# Altium PCB UZ_D_Temperature_Card_LTC2983.PcbDoc (part 1 of 2)
Units mm, origin at the board's own origin, x right, y up, seen from the top; angles counter-clockwise.
Board outline 155.99 x 100 mm, 4 copper layers (Top Layer, Layer 1, Layer 2, Bottom Layer), stack 0.98 mm thick; 288 components, 267 nets, 958 pads, 313 vias.
Unrouted connection lines stored in the file: 35.
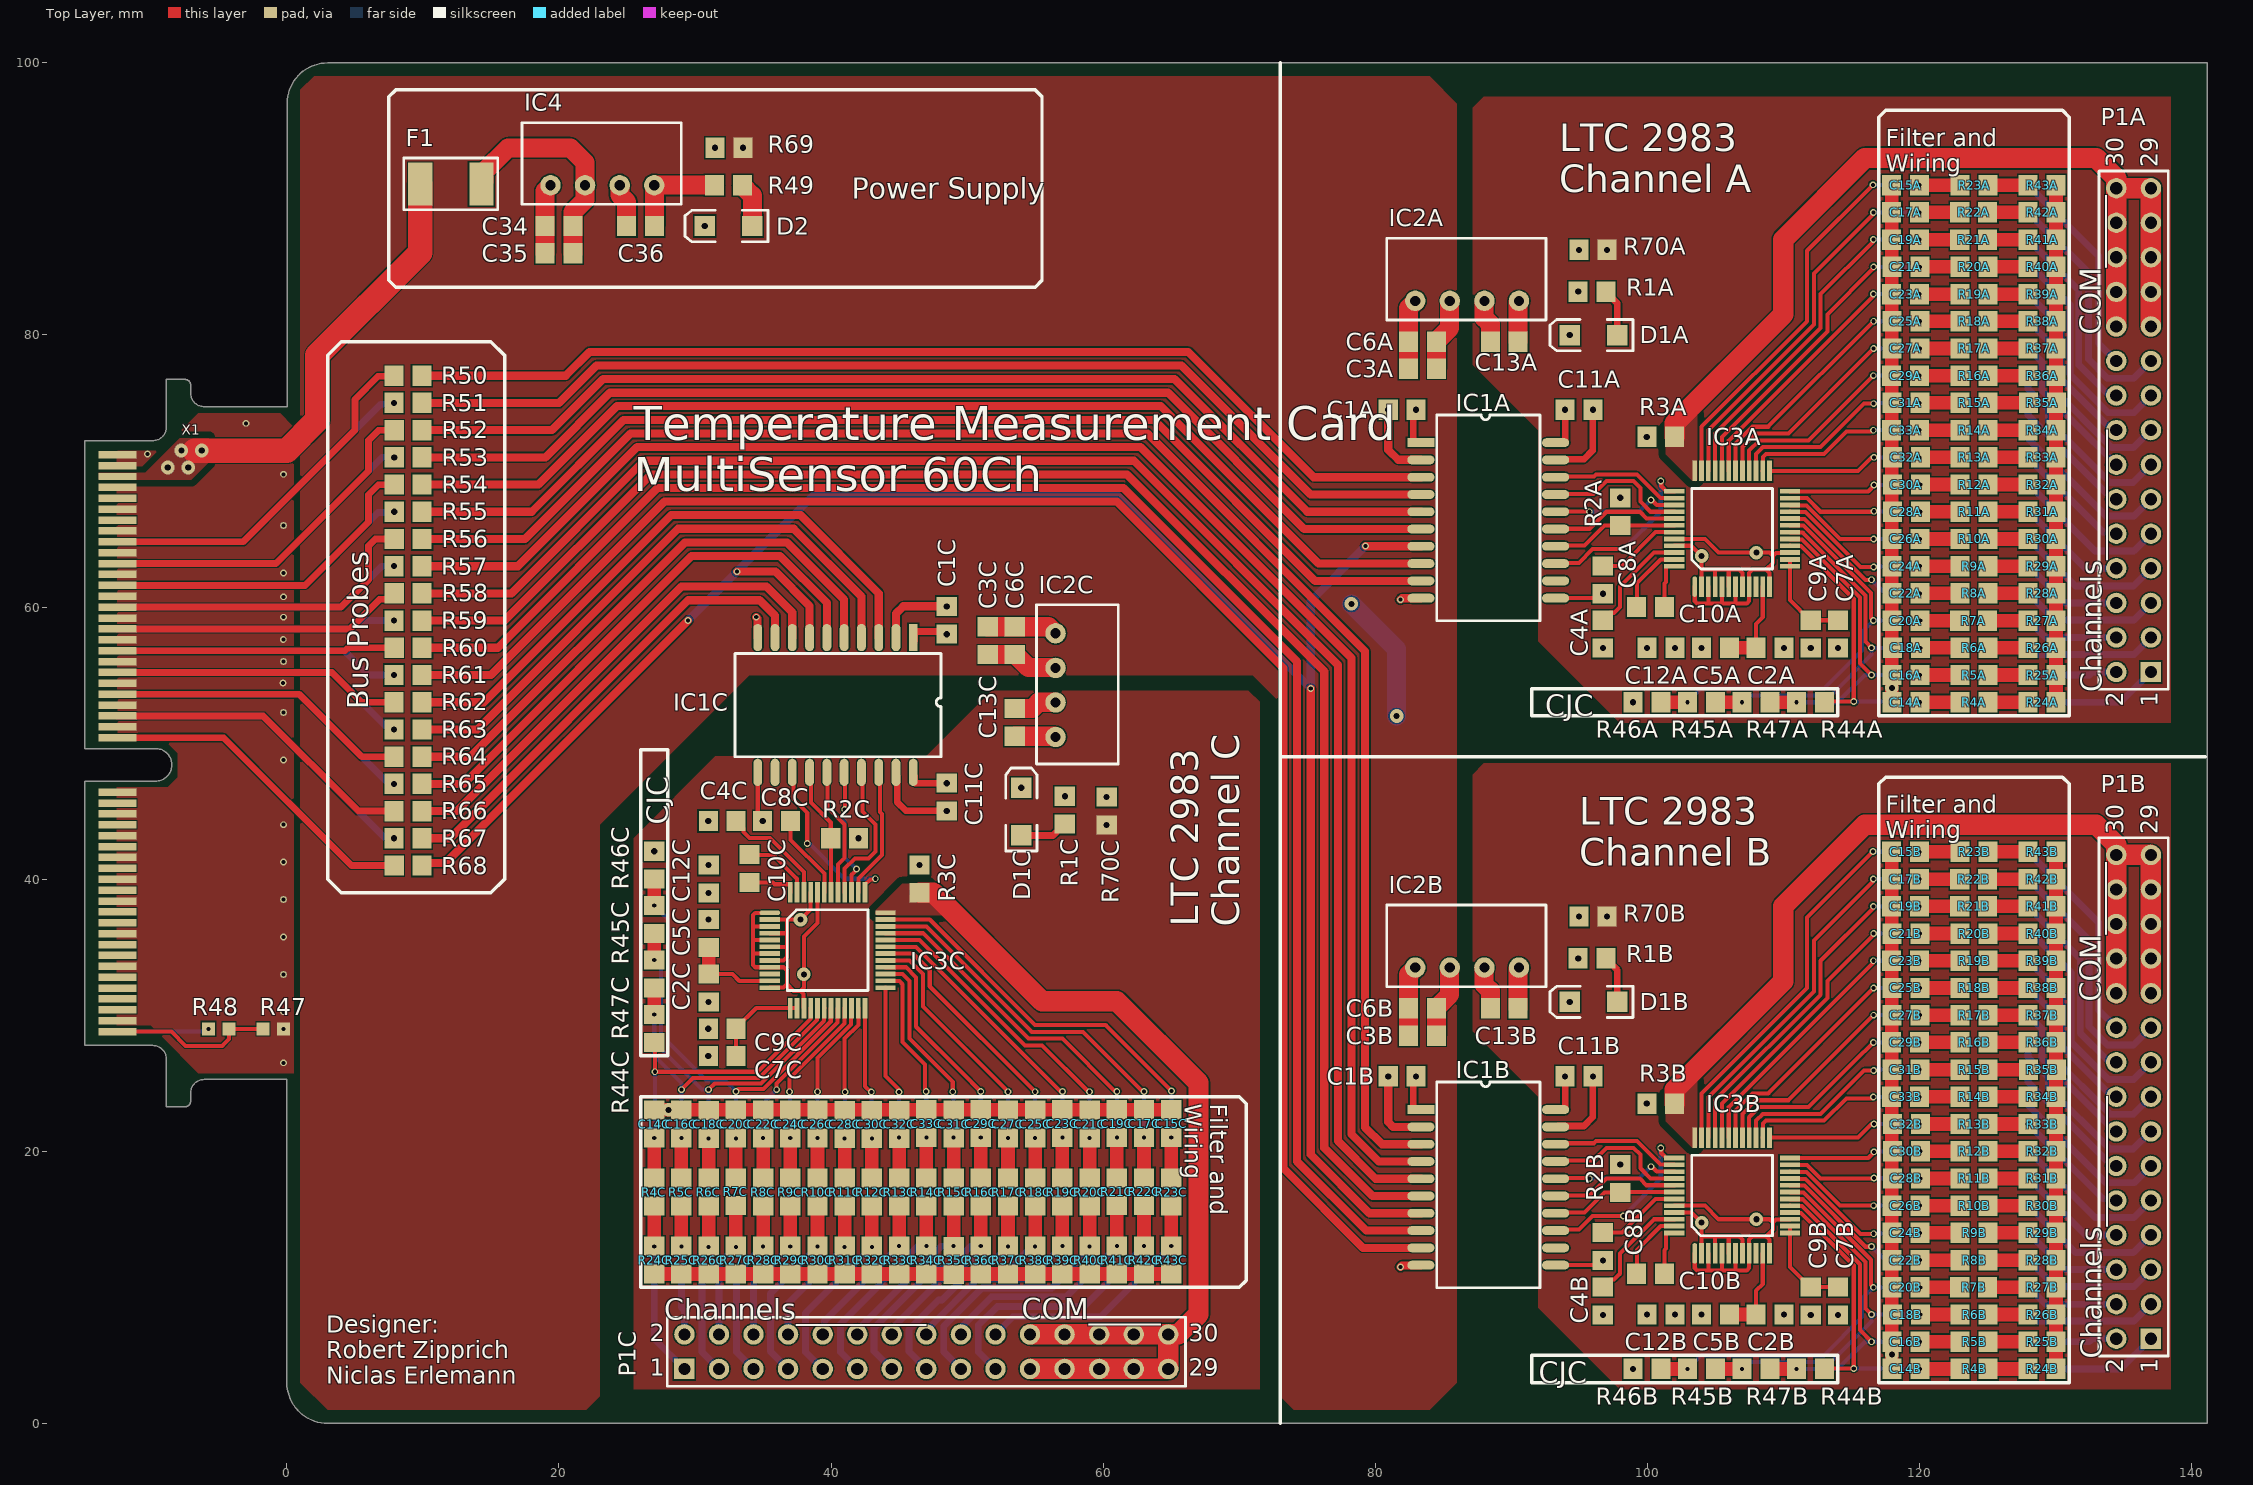
[diagram p0: Top Layer view]
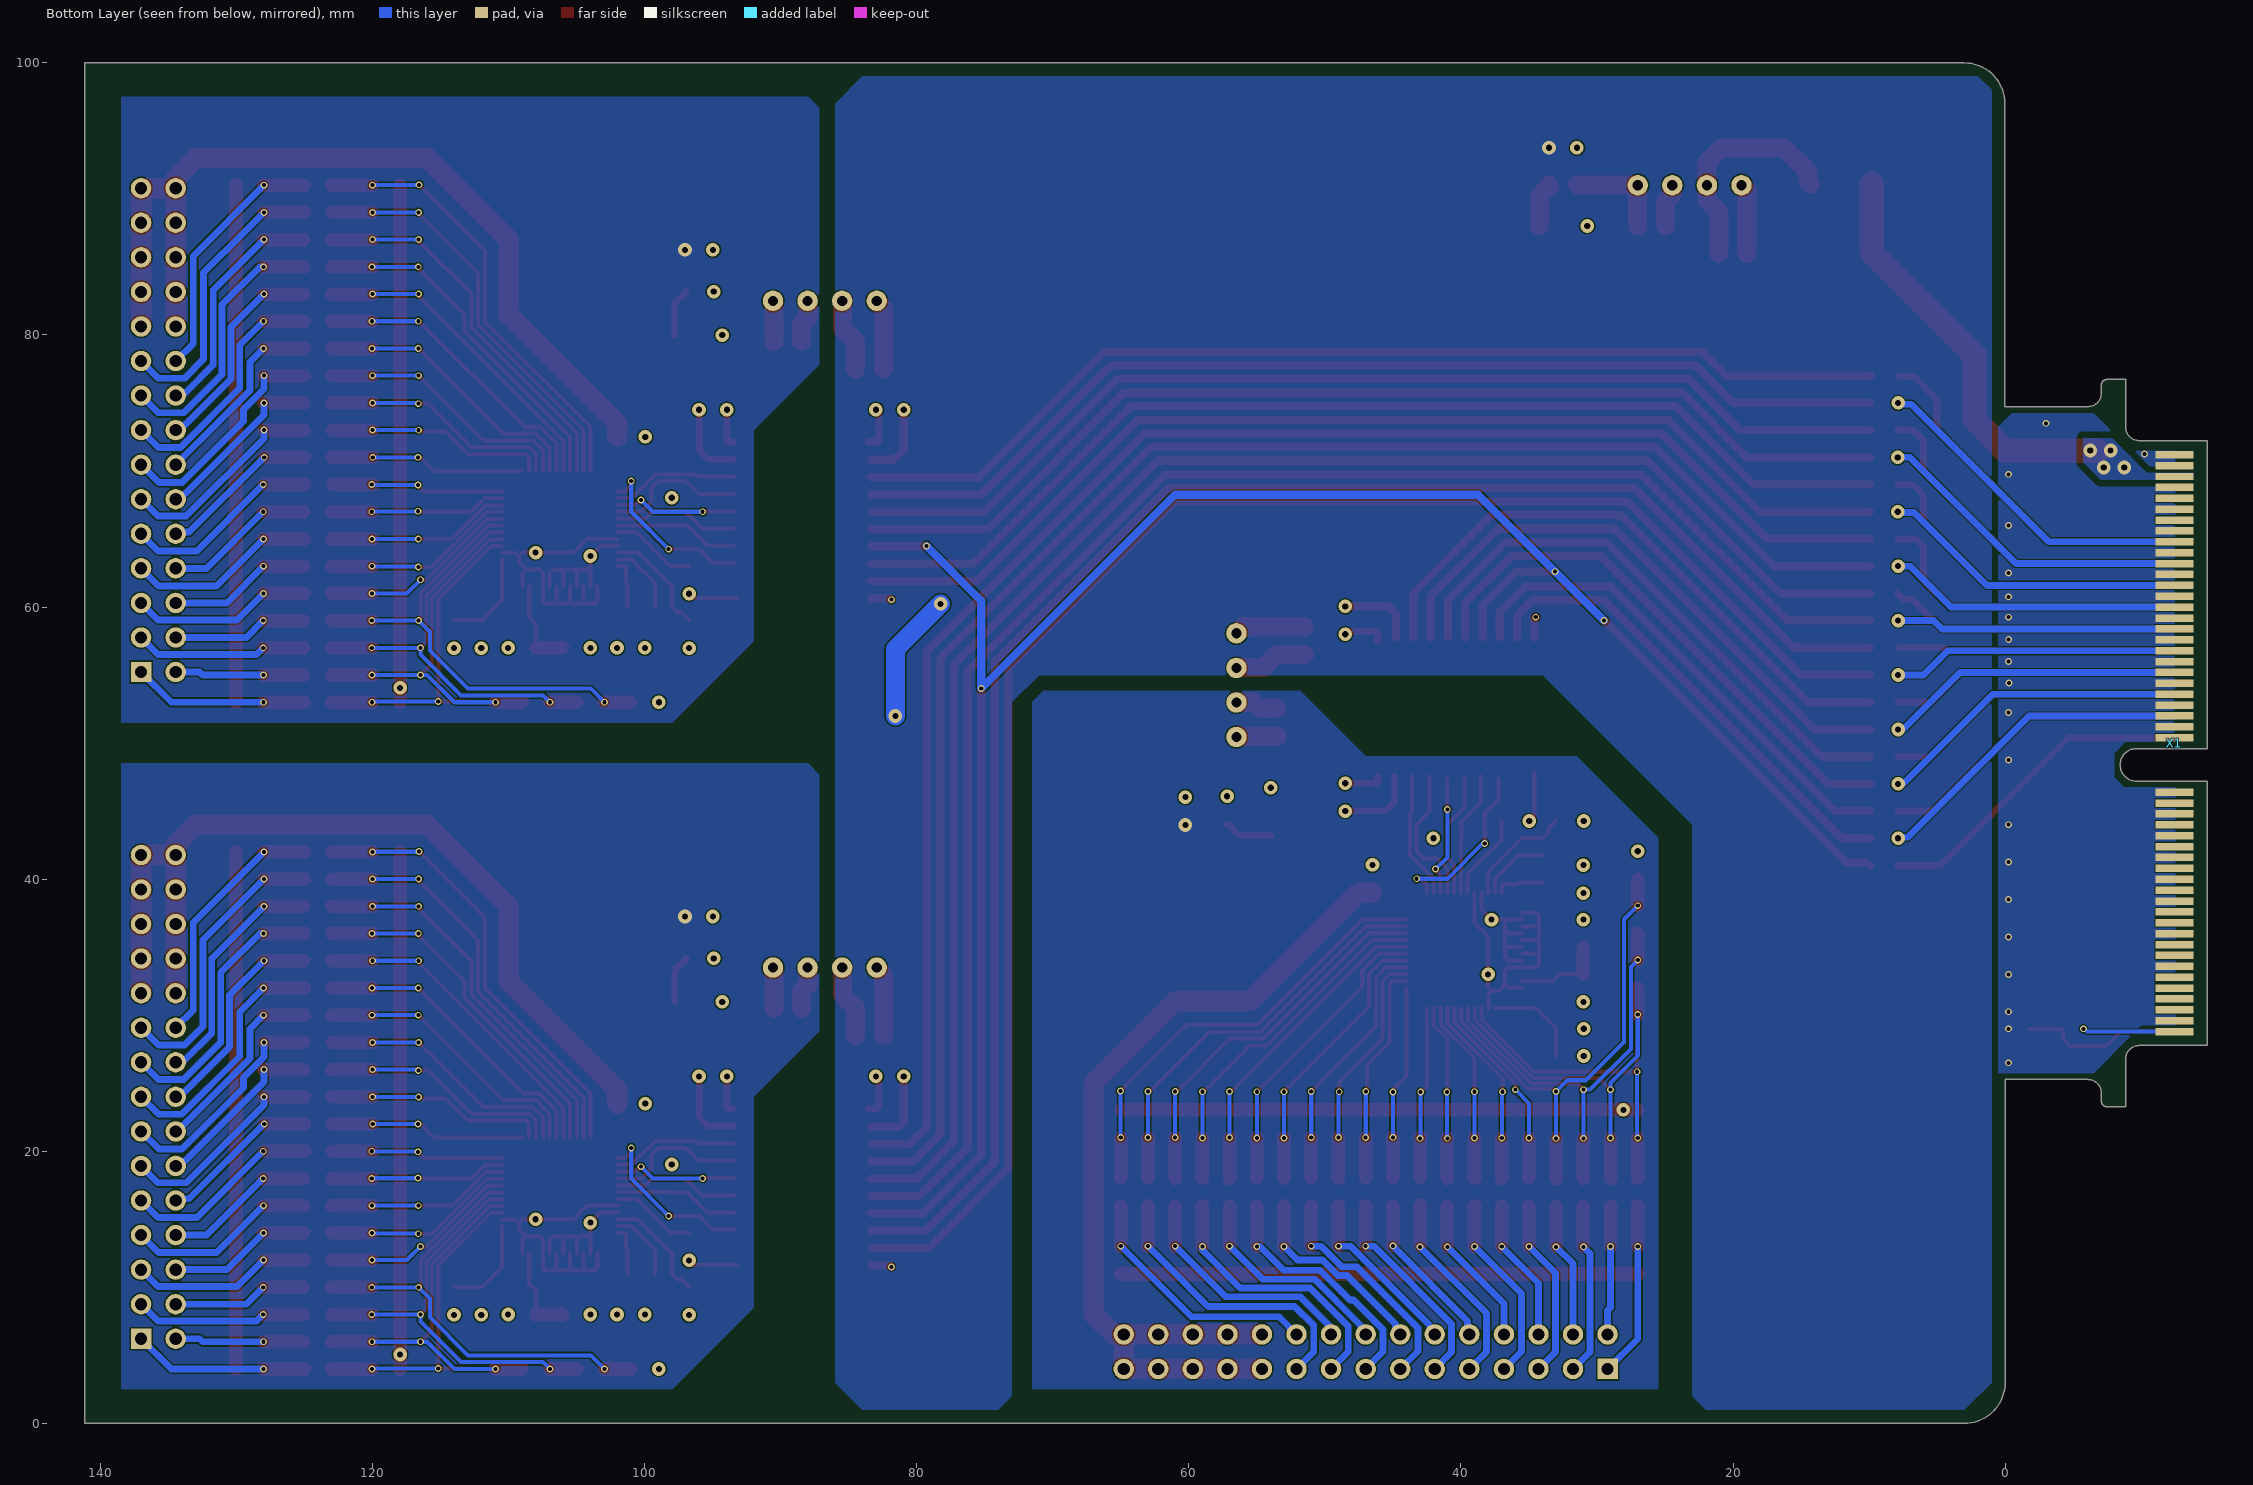
[diagram p1: Bottom Layer view, seen from below]
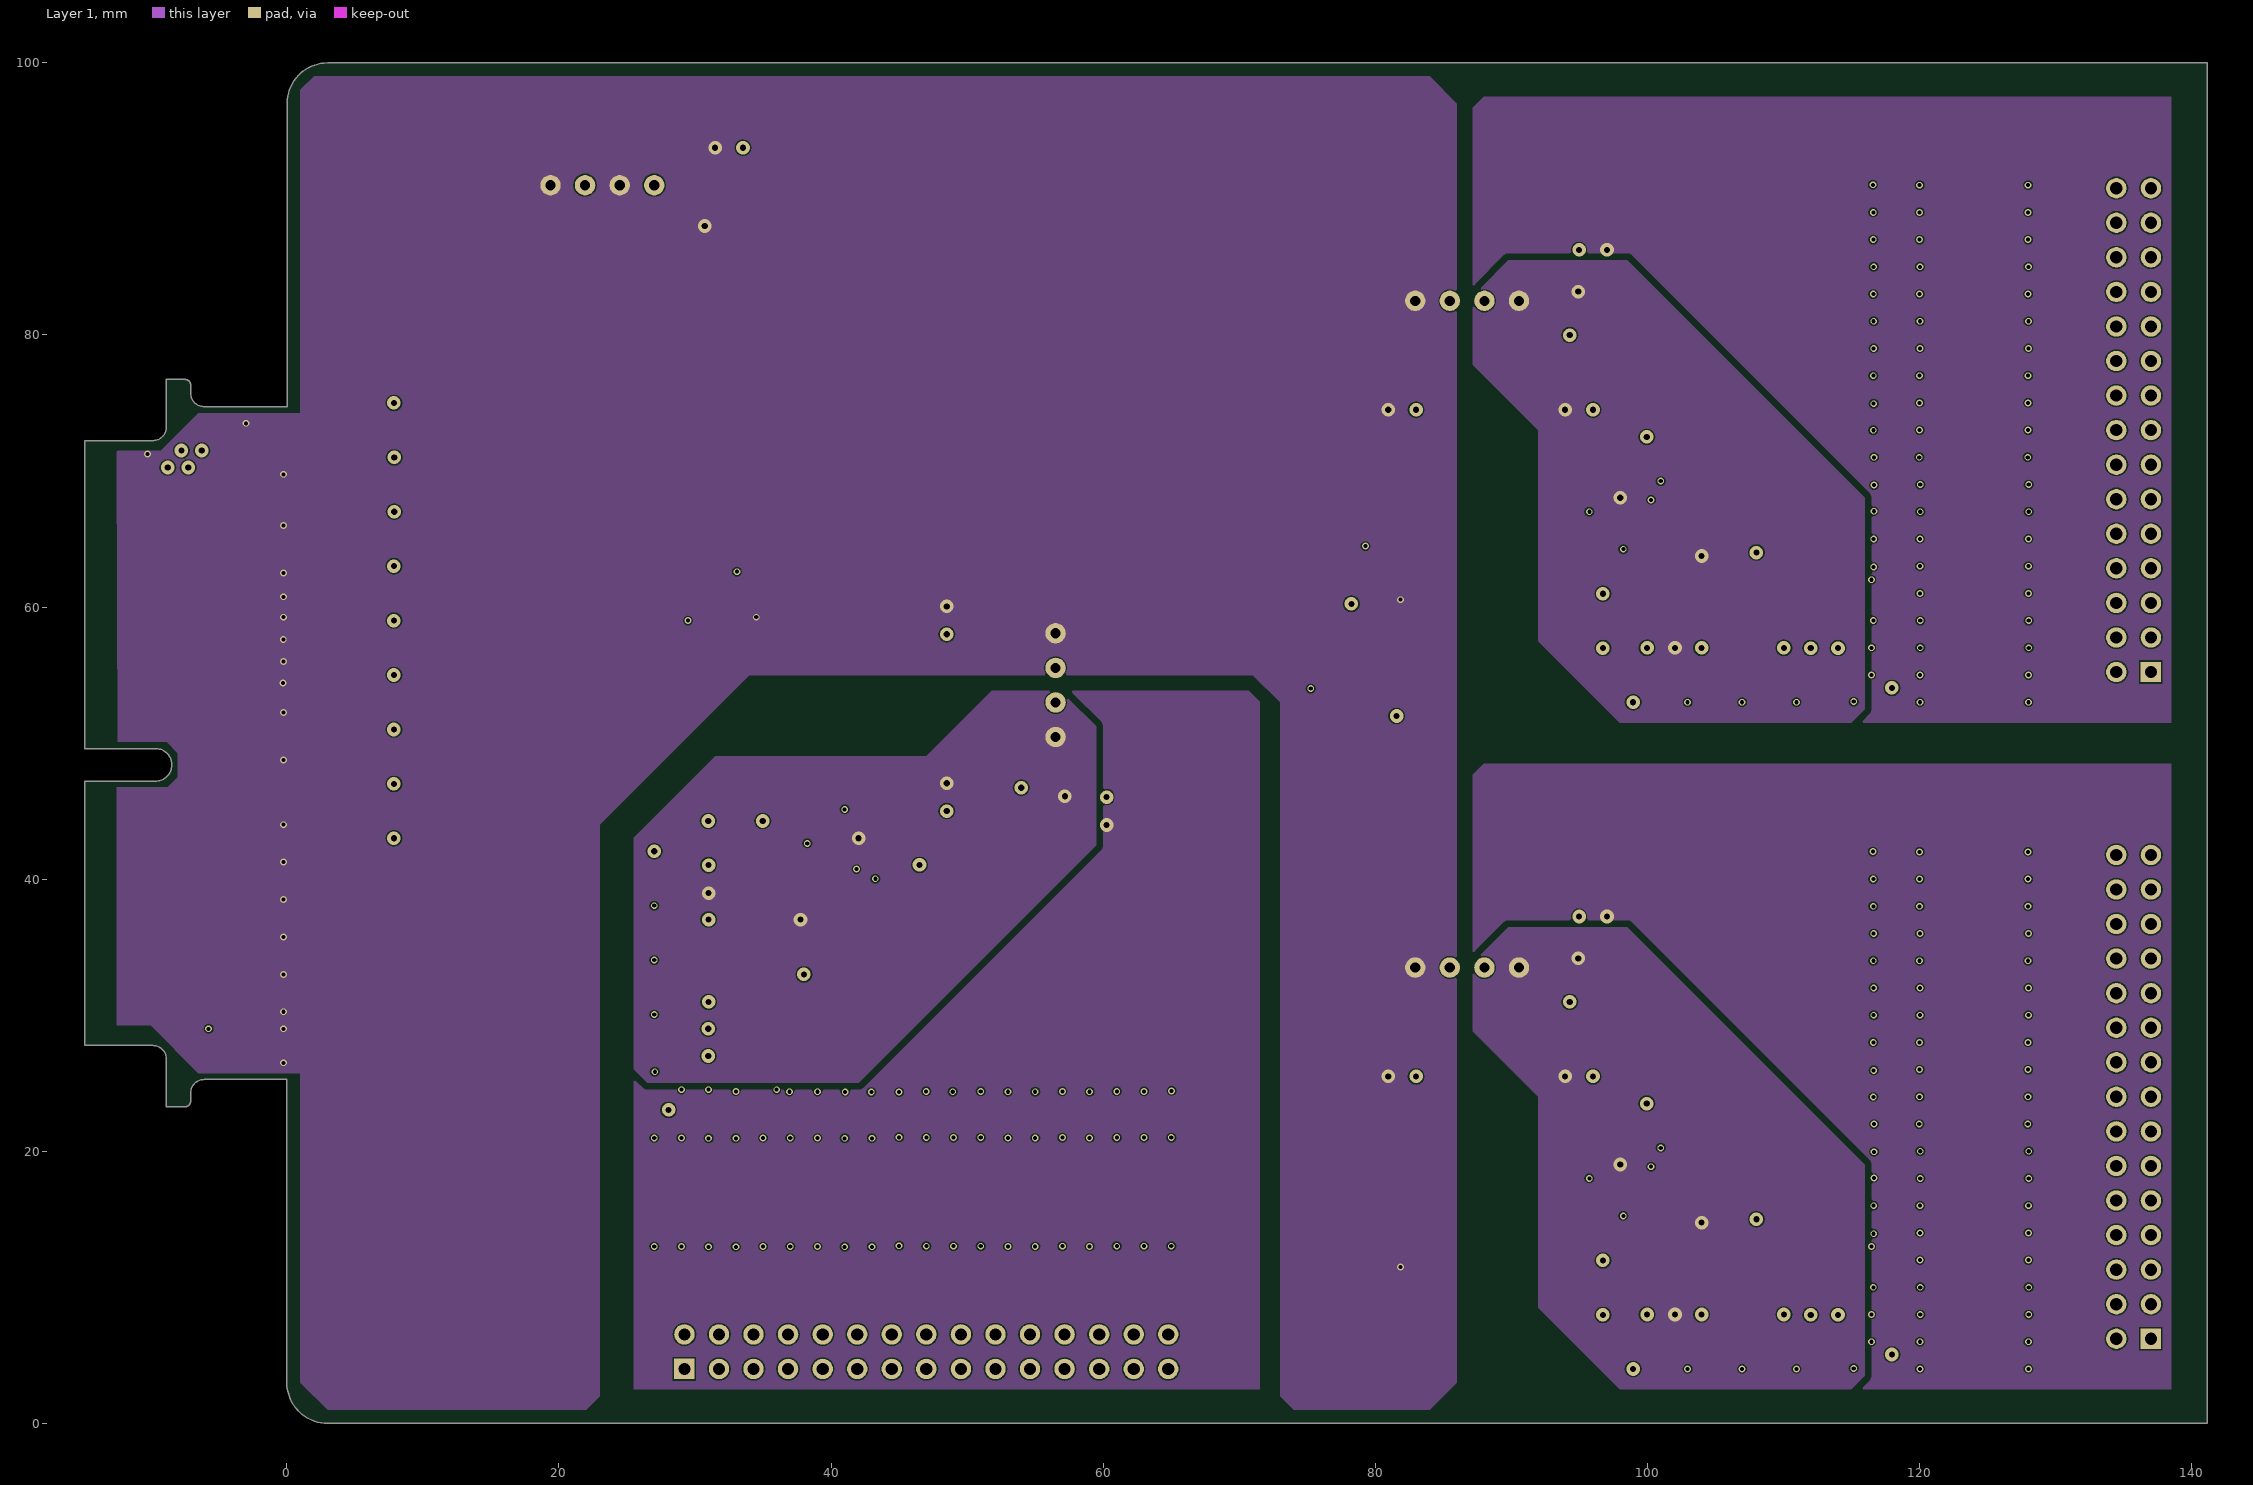
[diagram p2: Layer 1]
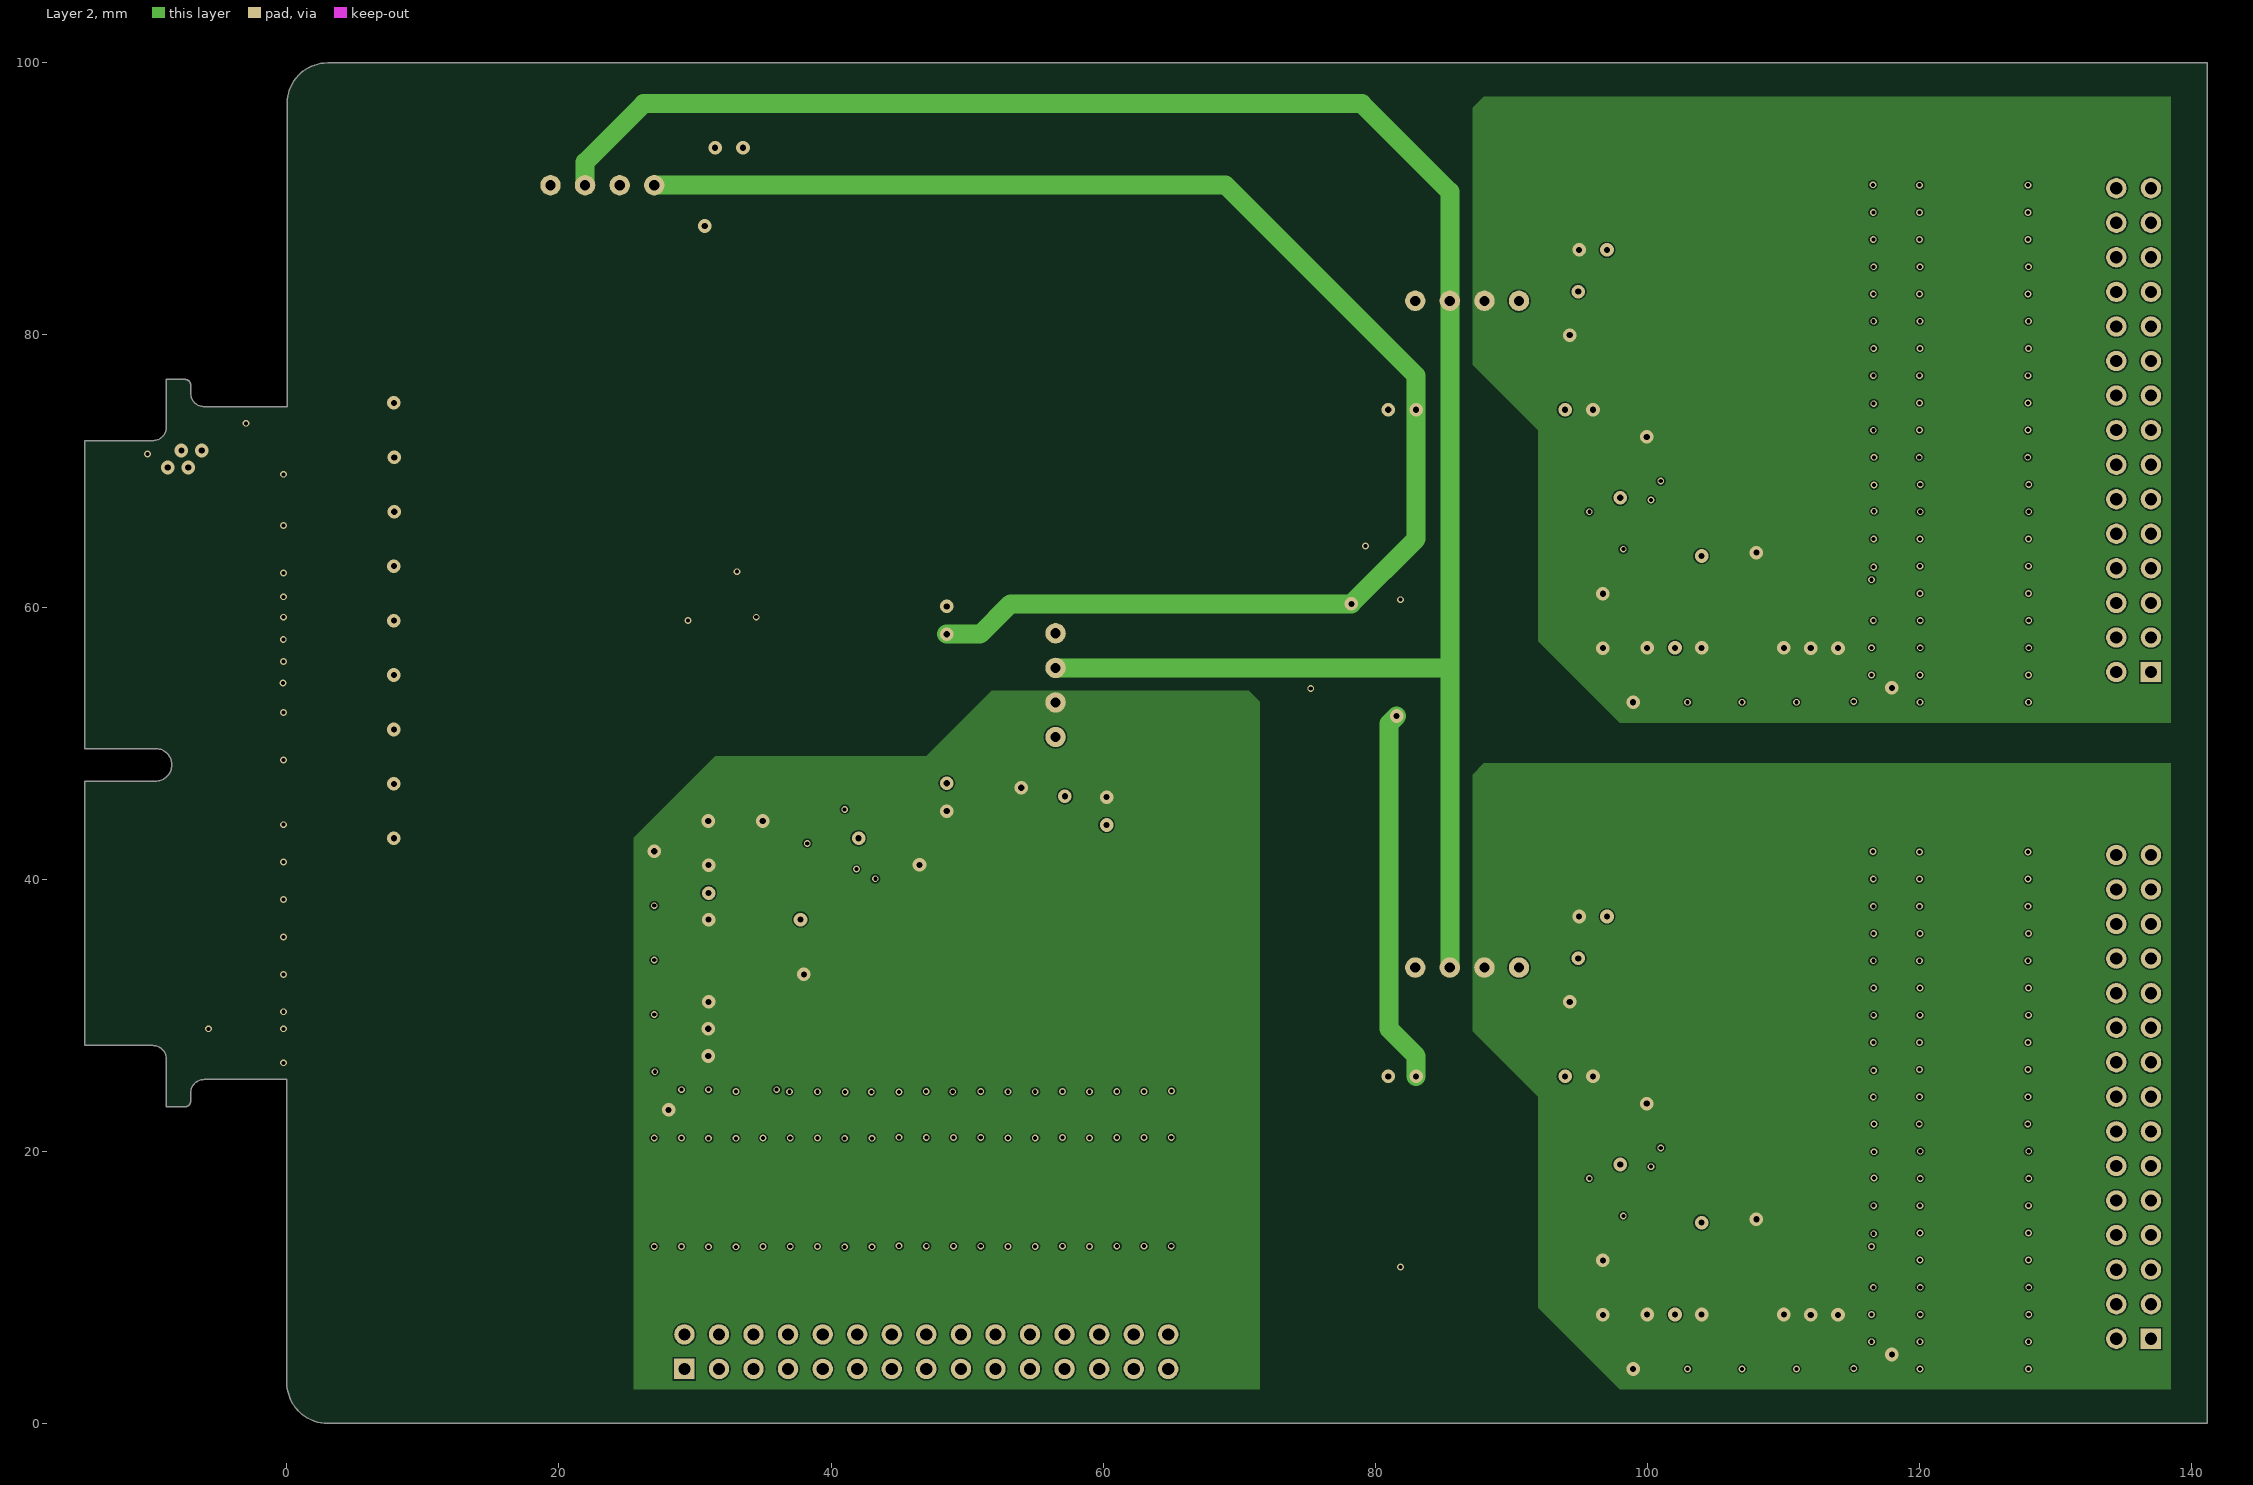
[diagram p3: Layer 2]

## Layer stack, top to bottom
Top Solder: solder mask 0.0102, Solder Resist, Dk 3.5
Top Layer: signal copper 0.035
Dielectric 2: prepreg 0.115, FR-4, Dk 4.4
Dielectric 4: prepreg 0.115, FR-4, Dk 4.4
Layer 1: signal copper 0.035
Dielectric 1: core 0.38, Core-036, Dk 4.4
Layer 2: signal copper 0.035
Dielectric 5: prepreg 0.115, FR-4, Dk 4.4
Dielectric 3: prepreg 0.115, FR-4, Dk 4.4
Bottom Layer: signal copper 0.035
Bottom Solder: solder mask 0.0102, Solder Resist, Dk 3.5

## Board outline
-14.853,27.775 -9.853,27.775 cw(c-9.853,26.775) -8.853,26.775 -8.853,23.275 -7.473,23.275 ccw(c-7.473,23.675) -7.073,23.675 -7.073,24.275 cw(c-6.073,24.275) -6.073,25.275 0,25.275 0,3 ccw(c3,3) 3,0 141.141,0 141.141,100 2.99,99.99 ccw(c2.99,97.032) 0.031,97.031 0.031,74.725 -6.073,74.725 cw(c-6.073,75.725) -7.073,75.725 -7.073,76.325 ccw(c-7.473,76.325) -7.473,76.725 -8.853,76.725 -8.853,73.225 cw(c-9.853,73.225) -9.853,72.225 -14.853,72.225 -14.853,49.6 -9.653,49.6 cw(c-9.653,48.4) -9.653,47.2 -14.853,47.2

## Design rules (kind name [scope] priority, off if disabled: settings)
AssemblyTestPointUsage [InNetClass('3V3_SingleEnded') or InNetClass('5V_SingleEnded') or InNetClass('15V_SingleEnded') or InNetClass('DifferentialSignals')] p1:
Clearance Clearance_Differential [InNetClass('DifferentialSignals')] p1: gap=0.1 ignorepadtopadclearanceinfootprint=TRUE except(0: Arc-Hole Track-Hole SMDPad-Hole THPad-Hole Via-Hole Fill-Hole Poly-Hole Region-Hole Text-Hole; 0.3: SMDPad-Via; 0.4: THPad-Via)
Clearance Clearance_Power [InNetClass('Power')] p2: gap=0.1 ignorepadtopadclearanceinfootprint=TRUE except(0: Arc-Hole Track-Hole SMDPad-Hole THPad-Hole Via-Hole Fill-Hole Poly-Hole Region-Hole Text-Hole; 0.15: Via-Poly; 0.2: Track-Poly; 0.25: THPad-Poly; 0.3: Fill-Poly Poly-Region; 0.5: Poly-Poly)
Clearance [All] p3: gap=0.1 ignorepadtopadclearanceinfootprint=TRUE except(0: SMDPad-Hole THPad-Hole Via-Hole Fill-Hole Poly-Hole Region-Hole Text-Hole; 0.4: SMDPad-Via THPad-Via; 0.5: Poly-Poly)
ComponentClearance [All] p1: gap=0.1 collisioncheckmode=3 verticalgap=0.1 showdistances=FALSE
DiffPairsRouting [InNetClass('DifferentialSignals')] p1: maxlimit=0.25 minlimit=0.127 mostfreqgap=0.25 toplayer_maxgap=0.127 toplayer_prefgap=0.127 toplayer_minwidth=0.285 toplayer_maxwidth=0.285 toplayer_prefwidth=0.285 midlayer1_minwidth=0.069 midlayer1_maxwidth=0.15 midlayer1_prefwidth=0.15 midlayer2_mingap=0.165 midlayer2_minwidth=0.1 midlayer2_maxwidth=0.15 midlayer2_prefwidth=0.15 bottomlayer_maxgap=0.127 bottomlayer_prefgap=0.127 bottomlayer_minwidth=0.285 bottomlayer_maxwidth=0.285 bottomlayer_prefwidth=0.285 impedanceprofiledriven=TRUE impedanceprofileid={5F7DE71B-7B0B-4CDE-8AE7-8AD61221F3A5} impedanceprofilevalue=100.000000 maxuncoupledlength=12.7
FanoutControl Fanout_Power [InNetClass('Power') or InNet('ENABLE')] p1: bgadir=Out bgaviamode=Centered fanoutstyle=Auto fanoutdirection=None viagrid=0.025
FanoutControl Fanout_RS422 [InNetClass('DifferentialSignals')] p2: bgadir=Out bgaviamode=Closest fanoutstyle=Rows fanoutdirection=OutOnly viagrid=0.025
FanoutControl Fanout_BGA [IsBGA] p3 off: bgadir=Out bgaviamode=Centered fanoutstyle=Auto fanoutdirection=Alternating viagrid=0.025 // Fanout_BGA (Default Rule)
FanoutControl Fanout_LCC [IsLCC] p4 off: bgadir=Out bgaviamode=Centered fanoutstyle=Auto fanoutdirection=Alternating viagrid=0.025 // Fanout_LCC (Default Rule)
FanoutControl Fanout_SOIC [IsSOIC] p5 off: bgadir=Out bgaviamode=Centered fanoutstyle=Auto fanoutdirection=Alternating viagrid=0.025 // Fanout_SOIC (Default Rule)
FanoutControl Fanout_Small [(CompPinCount < 5)] p6 off: bgadir=Out bgaviamode=Centered fanoutstyle=Auto fanoutdirection=OutThenIn viagrid=0.025 // Fanout_Small (Default Rule)
FanoutControl Fanout_Default [All] p7: bgadir=NE bgaviamode=Closest fanoutstyle=Rows fanoutdirection=InOnly viagrid=0.025 // Fanout_Default (Default Rule)
Height [All] p1: minheight=0 maxheight=50 prefheight=12.7
HoleSize [All] p1: absolutevalues=TRUE maxlimit=4 minlimit=0.025 maxpercent=80.000 minpercent=20.000
PolygonConnect PolygonConnect_Therm [HoleSize > 2.6] p1: connectstyle=Direct reliefconductorwidth=0.254 reliefentries=4 polygonreliefangle="90 Angle" airgapwidth=0.254
PolygonConnect PolygonConnect_via [InPadClass('pad') or IsVia] p2: connectstyle=Direct reliefconductorwidth=0.254 reliefentries=4 polygonreliefangle="90 Angle" airgapwidth=0.254
PolygonConnect [All] p3: connectstyle=Direct reliefconductorwidth=0.3 reliefentries=4 polygonreliefangle="90 Angle" airgapwidth=0.25
RoomDefinition LTC_Channel3 [InComponentClass('LTC_Channel3')] p1: confinementstyle=ConfineIn formatcopy=TRUE lockcomponents=FALSE outline 25,64 25,2 72,2 72,64
RoomDefinition Harness_Wrapper [InComponentClass('Harness_Wrapper')] p2: confinementstyle=ConfineIn formatcopy=TRUE lockcomponents=FALSE outline 4,39 72,39 72,98 4,98
RoomDefinition LTC_Channel1 [InComponentClass('LTC_Channel1')] p3: confinementstyle=ConfineIn formatcopy=TRUE lockcomponents=FALSE outline 77,51 139,51 139,98 77,98
RoomDefinition LTC_Channel2 [InComponentClass('LTC_Channel2')] p4: confinementstyle=ConfineIn formatcopy=TRUE lockcomponents=FALSE outline 77,2 139,2 139,49 77,49
RoomDefinition X1 [InComponentClass('X1')] p5: confinementstyle=ConfineIn formatcopy=TRUE lockcomponents=FALSE outline -19.05,21.59 3.81,21.59 3.81,79.756 -19.05,79.756
RoutingLayers RoutingLayers_3V3Signals [InNetClass('3V3_SingleEnded')] p1 off: top layer_v5=TRUE mid layer 1_v5=TRUE mid layer 2_v5=TRUE bottom layer_v5=TRUE
RoutingLayers RoutingLayers_SingleEnded [InNetClass('15V_SingleEnded') or InNetClass('3V3_SingleEnded') or InNetClass('5V_SingleEnded')] p2 off: top layer_v5=TRUE mid layer 1_v5=TRUE mid layer 2_v5=TRUE bottom layer_v5=TRUE
RoutingLayers RoutingLayers_Differential [InNetClass('DifferentialSignals')] p3 off: top layer_v5=TRUE mid layer 1_v5=TRUE mid layer 2_v5=TRUE bottom layer_v5=FALSE
RoutingLayers [All] p4: top layer_v5=TRUE mid layer 1_v5=TRUE mid layer 2_v5=TRUE bottom layer_v5=TRUE
RoutingVias [All] p1: holewidth=0.3 width=0.5 viastyle="Through Hole" minholewidth=0.2 minwidth=0.4 maxholewidth=0.5 maxwidth=1
SolderMaskExpansion [All] p1: expansion=0.102 istentingtop=FALSE
UnRoutedNet UnRoutedNet_Signals [InNetClass('15V_SingleEnded') or InNetClass('3V3_SingleEnded') or InNetClass('5V_SingleEnded') or InNetClass('DifferentialSignals')] p1: checkbadconnections=TRUE
UnRoutedNet [All] p2: checkbadconnections=TRUE
Width Width_Power [InNetClass('Power')] p1: maxlimit=10 minlimit=0.2 preferedwidth=0.3 minimp=50.000000 maximp=50.000000 favimp=50.000000
Width [All] p2: maxlimit=10 minlimit=0.1 preferedwidth=0.3 midlayer1_prefwidth=0.15 midlayer2_prefwidth=0.15 minimp=50.000000 maximp=50.000000 favimp=50.000000
18 further rules are at their usual default settings.

## Classes and differential pairs
net class VOB_BUS[3..1]: VOB_BUS1 VOB_BUS2 VOB_BUS3
net class MO_BUS[3..1]: MO_BUS1 MO_BUS2 MO_BUS3
net class MI_BUS[3..1]: MI_BUS1 MI_BUS2 MI_BUS3
net class MCLK_BUS[3..1]: MCLK_BUS1 MCLK_BUS2 MCLK_BUS3
net class M\S\S\_BUS[3..1]: M\S\S\_BUS1 M\S\S\_BUS2 M\S\S\_BUS3
net class DCLK_BUS[3..1]: DCLK_BUS1 DCLK_BUS2 DCLK_BUS3
component class LTC_Channel3: C1C C2C C3C C4C C5C C6C C7C C8C C9C C10C C11C C12C C13C C14C C15C C16C C17C C18C C19C C20C C21C C22C C23C C24C C25C C26C C27C C28C C29C C30C C31C C32C C33C D1C IC1C IC2C IC3C P1C R1C R2C R3C R4C R5C R6C R7C R8C R9C R10C R11C R12C R13C R14C R15C R16C R17C R18C R19C R20C R21C R22C R23C R24C R25C R26C R27C R28C R29C R30C R31C R32C R33C R34C R35C R36C R37C R38C R39C R40C R41C R42C R43C R44C R45C R46C R47C R70C
component class Harness_Wrapper: C34 C35 C36 D2 F1 IC4 R49 R50 R51 R52 R53 R54 R55 R56 R57 R58 R59 R60 R61 R62 R63 R64 R65 R66 R67 R68 R69
channel class LTC2983_Group_: LTC_Channel1 LTC_Channel2 LTC_Channel3
component class LTC_Channel2: C1B C2B C3B C4B C5B C6B C7B C8B C9B C10B C11B C12B C13B C14B C15B C16B C17B C18B C19B C20B C21B C22B C23B C24B C25B C26B C27B C28B C29B C30B C31B C32B C33B D1B IC1B IC2B IC3B P1B R1B R2B R3B R4B R5B R6B R7B R8B R9B R10B R11B R12B R13B R14B R15B R16B R17B R18B R19B R20B R21B R22B R23B R24B R25B R26B R27B R28B R29B R30B R31B R32B R33B R34B R35B R36B R37B R38B R39B R40B R41B R42B R43B R44B R45B R46B R47B R70B
component class LTC_Channel1: C1A C2A C3A C4A C5A C6A C7A C8A C9A C10A C11A C12A C13A C14A C15A C16A C17A C18A C19A C20A C21A C22A C23A C24A C25A C26A C27A C28A C29A C30A C31A C32A C33A D1A IC1A IC2A IC3A P1A R1A R2A R3A R4A R5A R6A R7A R8A R9A R10A R11A R12A R13A R14A R15A R16A R17A R18A R19A R20A R21A R22A R23A R24A R25A R26A R27A R28A R29A R30A R31A R32A R33A R34A R35A R36A R37A R38A R39A R40A R41A R42A R43A R44A R45A R46A R47A R70A
component class X1: R47 R48 X1

## Components (designator, comment, footprint, x,y, rotation, side; value= is the part's Value field where it differs from the comment)
C1A "100n" RLC_0805 81.975,74.5 r180 top (schematic designator C1)
C1B "100n" RLC_0805 81.975,25.5 r180 top (schematic designator C1)
C1C "100n" RLC_0805 48.5,59.025 r90 top (schematic designator C1)
C2A "10µ" RLC_0805 109,57 r180 top (schematic designator C2)
C2B "10µ" RLC_0805 109,8 r180 top (schematic designator C2)
C2C "10µ" RLC_0805 31,32 r90 top (schematic designator C2)
C3A "10µ" RLC_0805 83.475,77.5 r180 top (schematic designator C3)
C3B "10µ" RLC_0805 83.475,28.5 r180 top (schematic designator C3)
C3C "10µ" RLC_0805 51.5,57.525 r90 top (schematic designator C3)
C4A "10µ" RLC_0805 96.725,58 r270 top (schematic designator C4)
C4B "10µ" RLC_0805 96.725,9 r270 top (schematic designator C4)
C4C "10µ" RLC_0805 32,44.275 r180 top (schematic designator C4)
C5A "100n" RLC_0805 105,57 r0 top (schematic designator C5)
C5B "100n" RLC_0805 105,8 r0 top (schematic designator C5)
C5C "100n" RLC_0805 31,36 r270 top (schematic designator C5)
C6A "100n" RLC_0805 83.475,79.5 r180 top (schematic designator C6)
C6B "100n" RLC_0805 83.475,30.5 r180 top (schematic designator C6)
C6C "100n" RLC_0805 53.5,57.525 r90 top (schematic designator C6)
C7A "10µ" RLC_0805 114,58 r90 top (schematic designator C7)
C7B "10µ" RLC_0805 114,9 r90 top (schematic designator C7)
C7C "10µ" RLC_0805 32,27 r0 top (schematic designator C7)
C8A "10µ" RLC_0805 96.725,62 r270 top (schematic designator C8)
C8B "10µ" RLC_0805 96.725,13 r270 top (schematic designator C8)
C8C "10µ" RLC_0805 36,44.275 r180 top (schematic designator C8)
C9A "100n" RLC_0805 112,58 r90 top (schematic designator C9)
C9B "100n" RLC_0805 112,9 r90 top (schematic designator C9)
C9C "100n" RLC_0805 32,29 r0 top (schematic designator C9)
C10A "10µ" RLC_0805 100.225,60 r180 top (schematic designator C10)
C10B "10µ" RLC_0805 100.225,11 r180 top (schematic designator C10)
C10C "10µ" RLC_0805 34,40.775 r90 top (schematic designator C10)
C11A "100n" RLC_0805 94.975,74.5 r0 top (schematic designator C11)
C11B "100n" RLC_0805 94.975,25.5 r0 top (schematic designator C11)
C11C "100n" RLC_0805 48.5,46.025 r270 top (schematic designator C11)
C12A "100n" RLC_0805 101,57 r180 top (schematic designator C12)
C12B "100n" RLC_0805 101,8 r180 top (schematic designator C12)
C12C "100n" RLC_0805 31,40 r90 top (schematic designator C12)
C13A "10µ" RLC_0805 89.475,79.5 r180 top (schematic designator C13)
C13B "10µ" RLC_0805 89.475,30.5 r180 top (schematic designator C13)
C13C "10µ" RLC_0805 53.5,51.525 r90 top (schematic designator C13)
C14A "100n" RLC_0805 119,53 r180 top (schematic designator C14)
C14B "100n" RLC_0805 119,4 r180 top (schematic designator C14)
C14C "100n" RLC_0805 27,22 r90 top (schematic designator C14)
C15A "100n" RLC_0805 118.975,91 r0 top (schematic designator C15)
C15B "100n" RLC_0805 118.975,42 r0 top (schematic designator C15)
C15C "100n" RLC_0805 65,22.025 r270 top (schematic designator C15)
C16A "100n" RLC_0805 119,55 r180 top (schematic designator C16)
C16B "100n" RLC_0805 119,6 r180 top (schematic designator C16)
C16C "100n" RLC_0805 29,22 r90 top (schematic designator C16)
C17A "100n" RLC_0805 118.975,89 r0 top (schematic designator C17)
C17B "100n" RLC_0805 118.975,40 r0 top (schematic designator C17)
C17C "100n" RLC_0805 63,22.025 r270 top (schematic designator C17)
C18A "100n" RLC_0805 119.025,57 r180 top (schematic designator C18)
C18B "100n" RLC_0805 119.025,8 r180 top (schematic designator C18)
C18C "100n" RLC_0805 31,21.975 r90 top (schematic designator C18)
C19A "100n" RLC_0805 118.975,87 r0 top (schematic designator C19)
C19B "100n" RLC_0805 118.975,38 r0 top (schematic designator C19)
C19C "100n" RLC_0805 61,22.025 r270 top (schematic designator C19)
C20A "100n" RLC_0805 119,59 r180 top (schematic designator C20)
C20B "100n" RLC_0805 119,10 r180 top (schematic designator C20)
C20C "100n" RLC_0805 33,22 r90 top (schematic designator C20)
C21A "100n" RLC_0805 119,85 r0 top (schematic designator C21)
C21B "100n" RLC_0805 119,36 r0 top (schematic designator C21)
C21C "100n" RLC_0805 59,22 r270 top (schematic designator C21)
C22A "100n" RLC_0805 119,61 r180 top (schematic designator C22)
C22B "100n" RLC_0805 119,12 r180 top (schematic designator C22)
C22C "100n" RLC_0805 35,22 r90 top (schematic designator C22)
C23A "100n" RLC_0805 118.975,83 r0 top (schematic designator C23)
C23B "100n" RLC_0805 118.975,34 r0 top (schematic designator C23)
C23C "100n" RLC_0805 57,22.025 r270 top (schematic designator C23)
C24A "100n" RLC_0805 119,63 r180 top (schematic designator C24)
C24B "100n" RLC_0805 119,14 r180 top (schematic designator C24)
C24C "100n" RLC_0805 37,22 r90 top (schematic designator C24)
C25A "100n" RLC_0805 119,81 r0 top (schematic designator C25)
C25B "100n" RLC_0805 119,32 r0 top (schematic designator C25)
C25C "100n" RLC_0805 55,22 r270 top (schematic designator C25)
C26A "100n" RLC_0805 119,65 r180 top (schematic designator C26)
C26B "100n" RLC_0805 119,16 r180 top (schematic designator C26)
C26C "100n" RLC_0805 39,22 r90 top (schematic designator C26)
C27A "100n" RLC_0805 119,79 r0 top (schematic designator C27)
C27B "100n" RLC_0805 119,30 r0 top (schematic designator C27)
C27C "100n" RLC_0805 53,22 r270 top (schematic designator C27)
C28A "100n" RLC_0805 119.025,67 r180 top (schematic designator C28)
C28B "100n" RLC_0805 119.025,18 r180 top (schematic designator C28)
C28C "100n" RLC_0805 41,21.975 r90 top (schematic designator C28)
C29A "100n" RLC_0805 118.975,77 r0 top (schematic designator C29)
C29B "100n" RLC_0805 118.975,28 r0 top (schematic designator C29)
C29C "100n" RLC_0805 51,22.025 r270 top (schematic designator C29)
C30A "100n" RLC_0805 119.025,69 r180 top (schematic designator C30)
C30B "100n" RLC_0805 119.025,20 r180 top (schematic designator C30)
C30C "100n" RLC_0805 43,21.975 r90 top (schematic designator C30)
C31A "100n" RLC_0805 119,75 r0 top (schematic designator C31)
C31B "100n" RLC_0805 119,26 r0 top (schematic designator C31)
C31C "100n" RLC_0805 49,22 r270 top (schematic designator C31)
C32A "100n" RLC_0805 119.025,71 r180 top (schematic designator C32)
C32B "100n" RLC_0805 119.025,22 r180 top (schematic designator C32)
C32C "100n" RLC_0805 45,21.975 r90 top (schematic designator C32)
C33A "100n" RLC_0805 118.975,73 r0 top (schematic designator C33)
C33B "100n" RLC_0805 118.975,24 r0 top (schematic designator C33)
C33C "100n" RLC_0805 47,22.025 r270 top (schematic designator C33)
C34 "10µ" RLC_0805 20,88 r180 top
C35 "100n" RLC_0805 20,86 r180 top
C36 "10µ" RLC_0805 26,88 r180 top
D1A "LED2" 3.2X1.6X1.1 96.035,79.978 r180 top (schematic designator D1)
D1B "LED2" 3.2X1.6X1.1 96.035,30.978 r180 top (schematic designator D1)
D1C "LED2" 3.2X1.6X1.1 53.978,44.965 r90 top (schematic designator D1)
D2 "LED2" 3.2X1.6X1.1 32.46,88 r180 top
F1 "Fuse" RLC_1812 12,91 r0 top
IC1A "ADUM4150" SOIC-20-ADUM4150 83.35,72.08 r0 top (schematic designator IC1)
IC1B "ADUM4150" SOIC-20-ADUM4150 83.35,23.06 r0 top (schematic designator IC1)
IC1C "ADUM4150" SOIC-20-ADUM4150 46.04,57.75 r270 top (schematic designator IC1)
IC2A "DC/DC_Single" SIP4DCDC 82.935,82.5 r0 top (schematic designator IC2)
IC2B "DC/DC_Single" SIP4DCDC 82.935,33.5 r0 top (schematic designator IC2)
IC2C "DC/DC_Single" SIP4DCDC 56.5,58.065 r270 top (schematic designator IC2)
IC3A "LTC2983" 48_LGFP(7x7) 103.475,61.5 r90 top (schematic designator IC3)
IC3B "LTC2983" 48_LGFP(7x7) 103.475,12.5 r90 top (schematic designator IC3)
IC3C "LTC2983" 48_LGFP(7x7) 35.5,37.525 r0 top (schematic designator IC3)
IC4 "DC/DC_Single" SIP4DCDC 19.38,91 r0 top
P1A "Header 15X2" HDR2X15 137,55.22 r90 top (schematic designator P1)
P1B "Header 15X2" HDR2X15 137,6.22 r90 top (schematic designator P1)
P1C "Header 15X2" HDR2X15 29.22,4 r0 top (schematic designator P1)
R1A "680" RLC_0805 95.935,83.18 r0 top (schematic designator R1)
R1B "680" RLC_0805 95.935,34.18 r0 top (schematic designator R1)
R1C "680" RLC_0805 57.18,45.065 r270 top (schematic designator R1)
R2A "10k" RLC_0805 98,67 r90 top (schematic designator R2)
R2B "10k" RLC_0805 98,18 r90 top (schematic designator R2)
R2C "10k" RLC_0805 41,43 r0 top (schematic designator R2)
R3A "R" RLC_0805 100.975,72.5 r180 top (schematic designator R3)
R3B "R" RLC_0805 100.975,23.5 r180 top (schematic designator R3)
R3C "R" RLC_0805 46.5,40.025 r90 top (schematic designator R3)
R4A "1k" RLC_0805 124,53 r0 top (schematic designator R4)
R4B "1k" RLC_0805 124,4 r0 top (schematic designator R4)
R4C "1k" RLC_0805 27,17 r270 top (schematic designator R4)
R5A "1k" RLC_0805 124,55 r0 top (schematic designator R5)
R5B "1k" RLC_0805 124,6 r0 top (schematic designator R5)
R5C "1k" RLC_0805 29,17 r270 top (schematic designator R5)
R6A "1k" RLC_0805 124,57 r0 top (schematic designator R6)
R6B "1k" RLC_0805 124,8 r0 top (schematic designator R6)
R6C "1k" RLC_0805 31,17 r270 top (schematic designator R6)
R7A "1k" RLC_0805 123.975,59 r0 top (schematic designator R7)
R7B "1k" RLC_0805 123.975,10 r0 top (schematic designator R7)
R7C "1k" RLC_0805 33,17.025 r270 top (schematic designator R7)
R8A "1k" RLC_0805 124,61 r0 top (schematic designator R8)
R8B "1k" RLC_0805 124,12 r0 top (schematic designator R8)
R8C "1k" RLC_0805 35,17 r270 top (schematic designator R8)
R9A "1k" RLC_0805 124,63 r0 top (schematic designator R9)
R9B "1k" RLC_0805 124,14 r0 top (schematic designator R9)
R9C "1k" RLC_0805 37,17 r270 top (schematic designator R9)
R10A "1k" RLC_0805 124,65 r0 top (schematic designator R10)
R10B "1k" RLC_0805 124,16 r0 top (schematic designator R10)
R10C "1k" RLC_0805 39,17 r270 top (schematic designator R10)
R11A "1k" RLC_0805 124,67 r0 top (schematic designator R11)
R11B "1k" RLC_0805 124,18 r0 top (schematic designator R11)
R11C "1k" RLC_0805 41,17 r270 top (schematic designator R11)
R12A "1k" RLC_0805 124,69 r0 top (schematic designator R12)
R12B "1k" RLC_0805 124,20 r0 top (schematic designator R12)
R12C "1k" RLC_0805 43,17 r270 top (schematic designator R12)
R13A "1k" RLC_0805 124,71 r0 top (schematic designator R13)
R13B "1k" RLC_0805 124,22 r0 top (schematic designator R13)
R13C "1k" RLC_0805 45,17 r270 top (schematic designator R13)
R14A "1k" RLC_0805 124,73 r0 top (schematic designator R14)
R14B "1k" RLC_0805 124,24 r0 top (schematic designator R14)
R14C "1k" RLC_0805 47,17 r270 top (schematic designator R14)
R15A "1k" RLC_0805 124,75 r0 top (schematic designator R15)
R15B "1k" RLC_0805 124,26 r0 top (schematic designator R15)
R15C "1k" RLC_0805 49,17 r270 top (schematic designator R15)
R16A "1k" RLC_0805 124,77 r0 top (schematic designator R16)
R16B "1k" RLC_0805 124,28 r0 top (schematic designator R16)
R16C "1k" RLC_0805 51,17 r270 top (schematic designator R16)
R17A "1k" RLC_0805 124,79 r0 top (schematic designator R17)
R17B "1k" RLC_0805 124,30 r0 top (schematic designator R17)
R17C "1k" RLC_0805 53,17 r270 top (schematic designator R17)
R18A "1k" RLC_0805 124,81 r0 top (schematic designator R18)
R18B "1k" RLC_0805 124,32 r0 top (schematic designator R18)
R18C "1k" RLC_0805 55,17 r270 top (schematic designator R18)
R19A "1k" RLC_0805 124,83 r0 top (schematic designator R19)
R19B "1k" RLC_0805 124,34 r0 top (schematic designator R19)
R19C "1k" RLC_0805 57,17 r270 top (schematic designator R19)
R20A "1k" RLC_0805 124,85 r0 top (schematic designator R20)
R20B "1k" RLC_0805 124,36 r0 top (schematic designator R20)
R20C "1k" RLC_0805 59,17 r270 top (schematic designator R20)
R21A "1k" RLC_0805 123.975,87 r0 top (schematic designator R21)
R21B "1k" RLC_0805 123.975,38 r0 top (schematic designator R21)
R21C "1k" RLC_0805 61,17.025 r270 top (schematic designator R21)
R22A "1k" RLC_0805 123.975,89 r0 top (schematic designator R22)
R22B "1k" RLC_0805 123.975,40 r0 top (schematic designator R22)
R22C "1k" RLC_0805 63,17.025 r270 top (schematic designator R22)
R23A "1k" RLC_0805 124,91 r0 top (schematic designator R23)
R23B "1k" RLC_0805 124,42 r0 top (schematic designator R23)
R23C "1k" RLC_0805 65,17 r270 top (schematic designator R23)
R24A "R" RLC_0805 129,53 r0 top (schematic designator R24)
R24B "R" RLC_0805 129,4 r0 top (schematic designator R24)
R24C "R" RLC_0805 27,12 r270 top (schematic designator R24)
R25A "R" RLC_0805 129,55 r0 top (schematic designator R25)
R25B "R" RLC_0805 129,6 r0 top (schematic designator R25)
R25C "R" RLC_0805 29,12 r270 top (schematic designator R25)
R26A "R" RLC_0805 129,57 r0 top (schematic designator R26)
R26B "R" RLC_0805 129,8 r0 top (schematic designator R26)
R26C "R" RLC_0805 31,12 r270 top (schematic designator R26)
R27A "R" RLC_0805 129,59 r0 top (schematic designator R27)
R27B "R" RLC_0805 129,10 r0 top (schematic designator R27)
R27C "R" RLC_0805 33,12 r270 top (schematic designator R27)
R28A "R" RLC_0805 129,61 r0 top (schematic designator R28)
R28B "R" RLC_0805 129,12 r0 top (schematic designator R28)
R28C "R" RLC_0805 35,12 r270 top (schematic designator R28)
R29A "R" RLC_0805 129,63 r0 top (schematic designator R29)
R29B "R" RLC_0805 129,14 r0 top (schematic designator R29)
R29C "R" RLC_0805 37,12 r270 top (schematic designator R29)
R30A "R" RLC_0805 129,65 r0 top (schematic designator R30)
R30B "R" RLC_0805 129,16 r0 top (schematic designator R30)
R30C "R" RLC_0805 39,12 r270 top (schematic designator R30)
R31A "R" RLC_0805 129,67 r0 top (schematic designator R31)
R31B "R" RLC_0805 129,18 r0 top (schematic designator R31)
R31C "R" RLC_0805 41,12 r270 top (schematic designator R31)
R32A "R" RLC_0805 129,69 r0 top (schematic designator R32)
R32B "R" RLC_0805 129,20 r0 top (schematic designator R32)
R32C "R" RLC_0805 43,12 r270 top (schematic designator R32)
R33A "R" RLC_0805 129,71 r0 top (schematic designator R33)
R33B "R" RLC_0805 129,22 r0 top (schematic designator R33)
R33C "R" RLC_0805 45,12 r270 top (schematic designator R33)
R34A "R" RLC_0805 129,73 r0 top (schematic designator R34)
R34B "R" RLC_0805 129,24 r0 top (schematic designator R34)
R34C "R" RLC_0805 47,12 r270 top (schematic designator R34)
R35A "R" RLC_0805 129.025,75 r0 top (schematic designator R35)
R35B "R" RLC_0805 129.025,26 r0 top (schematic designator R35)
R35C "R" RLC_0805 49,11.975 r270 top (schematic designator R35)
R36A "R" RLC_0805 129,77 r0 top (schematic designator R36)
R36B "R" RLC_0805 129,28 r0 top (schematic designator R36)
R36C "R" RLC_0805 51,12 r270 top (schematic designator R36)
R37A "R" RLC_0805 129,79 r0 top (schematic designator R37)
R37B "R" RLC_0805 129,30 r0 top (schematic designator R37)
R37C "R" RLC_0805 53,12 r270 top (schematic designator R37)
R38A "R" RLC_0805 129,81 r0 top (schematic designator R38)
R38B "R" RLC_0805 129,32 r0 top (schematic designator R38)
R38C "R" RLC_0805 55,12 r270 top (schematic designator R38)
R39A "R" RLC_0805 129,83 r0 top (schematic designator R39)
R39B "R" RLC_0805 129,34 r0 top (schematic designator R39)
R39C "R" RLC_0805 57,12 r270 top (schematic designator R39)
R40A "R" RLC_0805 129,85 r0 top (schematic designator R40)
R40B "R" RLC_0805 129,36 r0 top (schematic designator R40)
R40C "R" RLC_0805 59,12 r270 top (schematic designator R40)
R41A "R" RLC_0805 129,87 r0 top (schematic designator R41)
R41B "R" RLC_0805 129,38 r0 top (schematic designator R41)
R41C "R" RLC_0805 61,12 r270 top (schematic designator R41)
R42A "R" RLC_0805 129,89 r0 top (schematic designator R42)
R42B "R" RLC_0805 129,40 r0 top (schematic designator R42)
R42C "R" RLC_0805 63,12 r270 top (schematic designator R42)
R43A "R" RLC_0805 129,91 r0 top (schematic designator R43)
R43B "R" RLC_0805 129,42 r0 top (schematic designator R43)
R43C "R" RLC_0805 65,12 r270 top (schematic designator R43)
R44A "2k" RLC_0805 111.975,53 r180 top (schematic designator R44)
R44B "2k" RLC_0805 111.975,4 r180 top (schematic designator R44)
R44C "2k" RLC_0805 27,29.025 r90 top (schematic designator R44)
R45A "PT100" RLC_0805 103.975,53 r180 top (schematic designator R45)
R45B "PT100" RLC_0805 103.975,4 r180 top (schematic designator R45)
R45C "PT100" RLC_0805 27,37.025 r90 top (schematic designator R45)
R46A "R" RLC_0805 99.975,53 r180 top (schematic designator R46)
R46B "R" RLC_0805 99.975,4 r180 top (schematic designator R46)
R46C "R" RLC_0805 27,41.025 r90 top (schematic designator R46)
R47 "R_TF" RESC1608X55X30NL15T15 -1,29 r180 top value=0
R47A "2k" RLC_0805 107.975,53 r180 top (schematic designator R47)
R47B "2k" RLC_0805 107.975,4 r180 top (schematic designator R47)
R47C "2k" RLC_0805 27,33.025 r90 top (schematic designator R47)
R48 "R_TF" RESC1608X55X30NL15T15 -5,29 r180 top value=0
R49 "680" RLC_0805 32.46,91 r0 top
R50 "100" RLC_0805 8.892,77 r0 top
R51 "100" RLC_0805 8.892,75 r0 top
R52 "100" RLC_0805 8.917,73 r0 top
R53 "100" RLC_0805 8.917,71 r0 top
R54 "100" RLC_0805 8.917,69 r0 top
R55 "100" RLC_0805 8.917,67 r0 top
R56 "100" RLC_0805 8.917,65 r0 top
R57 "100" RLC_0805 8.892,63 r0 top
R58 "100" RLC_0805 8.917,61 r0 top
R59 "100" RLC_0805 8.892,59 r0 top
R60 "100" RLC_0805 8.917,57 r0 top
R61 "100" RLC_0805 8.892,55 r0 top
R62 "100" RLC_0805 8.892,53 r0 top
R63 "100" RLC_0805 8.892,51 r0 top
R64 "100" RLC_0805 8.892,49 r0 top
R65 "100" RLC_0805 8.892,47 r0 top
R66 "100" RLC_0805 8.892,45 r0 top
R67 "100" RLC_0805 8.892,43 r0 top
R68 "100" RLC_0805 8.917,41 r0 top
R69 "0" RLC_0805 32.5,93.75 r0 top
R70A "0" RLC_0805 96,86.25 r0 top (schematic designator R70)
R70B "0" RLC_0805 96,37.25 r0 top (schematic designator R70)
R70C "0" RLC_0805 60.25,45 r270 top (schematic designator R70)
X1 "HSEC8-150-01-XX-DV-A-BL-CARD" HSEC8-150-01-XX-DV-A-BL-CARD -14.84,49.991 r270 bottom

## Footprints (in the part's own frame and the unit in brackets; to place one, negate y for a bottom-side part, rotate by r counter-clockwise, add the part's x,y. Pads: shape width x height; smd on the part's side, far side on the other; paste and mask are expansions set on the pad)
3.2X1.6X1.1 [mm] "SMT LED; 2 Flat Leads"
  rect 1.5x1.5 smd: 1(-1.75,0) 2(1.75,0)
  silkscreen extent -2.9,-1.15 3.2,1.15
48_LGFP(7x7) [mm]
  oval 1.5x0.35 smd: 1(0,0)
  rect 1.5x0.35 smd: 2(0,-0.5) 3(0,-1) 4(0,-1.5) 5(0,-2) 6(0,-2.5) 7(0,-3) 8(0,-3.5) 9(0,-4) 10(0,-4.5) 11(0,-5) 12(0,-5.5) 25(8.5,-5.5) 26(8.5,-5) 27(8.5,-4.5) 28(8.5,-4) 29(8.5,-3.5) 30(8.5,-3) 31(8.5,-2.5) 32(8.5,-2) 33(8.5,-1.5) 34(8.5,-1) 35(8.5,-0.5) 36(8.5,0)
  rect 0.35x1.5 smd: 13(1.5,-7) 14(2,-7) 15(2.5,-7) 16(3,-7) 17(3.5,-7) 18(4,-7) 19(4.5,-7) 20(5,-7) 21(5.5,-7) 22(6,-7) 23(6.5,-7) 24(7,-7) 37(7,1.5) 38(6.5,1.5) 39(6,1.5) 40(5.5,1.5) 41(5,1.5) 42(4.5,1.5) 43(4,1.5) 44(3.5,1.5) 45(3,1.5) 46(2.5,1.5) 47(2,1.5) 48(1.5,1.5)
  silkscreen extent 1.28,-5.71 7.21,0.22, body extent 0,-7 8.5,1.5, height 1.5
HDR2X15 [mm] "Connector; Header; 15x2 Position"
  rect 1.5x1.5 hole 0.9: 1(0,0)
  round 1.5 hole 0.9: 2(0,2.54) 3(2.54,0) 4(2.54,2.54) 5(5.08,0) 6(5.08,2.54) 7(7.62,0) 8(7.62,2.54) 9(10.16,0) 10(10.16,2.54) 11(12.7,0) 12(12.7,2.54) 13(15.24,0) 14(15.24,2.54) 15(17.78,0) 16(17.78,2.54) 17(20.32,0) 18(20.32,2.54) 19(22.86,0) 20(22.86,2.54) 21(25.4,0) 22(25.4,2.54) 23(27.94,0) 24(27.94,2.54) 25(30.48,0) 26(30.48,2.54) 27(33.02,0) 28(33.02,2.54) 29(35.56,0) 30(35.56,2.54)
  silkscreen extent -1.27,-1.27 36.83,3.81
HSEC8-150-01-XX-DV-A-BL-CARD [mm]
  rect 0.55x2.8 smd far side mask+0.05: 1(-21.2,-2.4) 3(-20.4,-2.4) 5(-19.6,-2.4) 7(-18.8,-2.4) 9(-18,-2.4) 11(-17.2,-2.4) 13(-16.4,-2.4) 15(-15.6,-2.4) 17(-14.8,-2.4) 19(-14,-2.4) 21(-13.2,-2.4) 23(-12.4,-2.4) 25(-11.6,-2.4) 27(-10.8,-2.4) 29(-10,-2.4) 31(-9.2,-2.4) 33(-8.4,-2.4) 35(-7.6,-2.4) 37(-6.8,-2.4) 39(-6,-2.4) 41(-5.2,-2.4) 43(-4.4,-2.4) 45(-3.6,-2.4) 47(-2.8,-2.4) 49(-2,-2.4) 51(-1.2,-2.4) 53(-0.4,-2.4) 55(3.6,-2.4) 57(4.4,-2.4) 59(5.2,-2.4) 61(6,-2.4) 63(6.8,-2.4) 65(7.6,-2.4) 67(8.4,-2.4) 69(9.2,-2.4) 71(10,-2.4) 73(10.8,-2.4) 75(11.6,-2.4) 77(12.4,-2.4) 79(13.2,-2.4) 81(14,-2.4) 83(14.8,-2.4) 85(15.6,-2.4) 87(16.4,-2.4) 89(17.2,-2.4) 91(18,-2.4) 93(18.8,-2.4) 95(19.6,-2.4) 97(20.4,-2.4) 99(21.2,-2.4)
  rect 0.55x2.8 smd mask+0.05: 2(-21.2,-2.4) 4(-20.4,-2.4) 6(-19.6,-2.4) 8(-18.8,-2.4) 10(-18,-2.4) 12(-17.2,-2.4) 14(-16.4,-2.4) 16(-15.6,-2.4) 18(-14.8,-2.4) 20(-14,-2.4) 22(-13.2,-2.4) 24(-12.4,-2.4) 26(-11.6,-2.4) 28(-10.8,-2.4) 30(-10,-2.4) 32(-9.2,-2.4) 34(-8.4,-2.4) 36(-7.6,-2.4) 38(-6.8,-2.4) 40(-6,-2.4) 42(-5.2,-2.4) 44(-4.4,-2.4) 46(-3.6,-2.4) 48(-2.8,-2.4) 50(-2,-2.4) 52(-1.2,-2.4) 54(-0.4,-2.4) 56(3.6,-2.4) 58(4.4,-2.4) 60(5.2,-2.4) 62(6,-2.4) 64(6.8,-2.4) 66(7.6,-2.4) 68(8.4,-2.4) 70(9.2,-2.4) 72(10,-2.4) 74(10.8,-2.4) 76(11.6,-2.4) 78(12.4,-2.4) 80(13.2,-2.4) 82(14,-2.4) 84(14.8,-2.4) 86(15.6,-2.4) 88(16.4,-2.4) 90(17.2,-2.4) 92(18,-2.4) 94(18.8,-2.4) 96(19.6,-2.4) 98(20.4,-2.4) 100(21.2,-2.4)
RESC1608X55X30NL15T15 [mm] "Chip Resistor, 2-Leads, Body 1.75x0.95mm, IPC Medium Density"
  rect 0.95x0.95 smd: 1(-0.75,0) 2(0.75,0)
  body extent -0.87,-0.48 0.87,0.48, height 0.55
RLC_0805 [mm]
  rect 1.4x1.5 smd: 1(-1.025,0) 2(1.025,0)
  body extent -1.02,-0.72 1.02,0.72, height 0.45
RLC_1812 [mm]
  rect 1.78x3.15 smd: 1(-2.2,0.1) 2(2.3,0.1)
  silkscreen extent -3.4,-1.8 3.5,2, body extent -2.2,-1.4 2.3,1.6, height 1
SIP4DCDC [mm]
  round 1.5 hole 0.75: 1(0,0) 2(2.54,0) 3(5.08,0) 4(7.62,0)
  silkscreen extent -2.1,-1.4 9.6,4.6, body extent -2.1,-1.4 9.6,4.6, height 10
SOIC-20-ADUM4150 [mm]
  rect 2x0.65 smd: 1(0,0)
  oval 2x0.65 smd: 2(0,-1.27) 3(0,-2.54) 4(0,-3.81) 5(0,-5.08) 6(0,-6.35) 7(0,-7.62) 8(0,-8.89) 9(0,-10.16) 10(0,-11.43) 11(9.9,-11.43) 12(9.9,-10.16) 13(9.9,-8.89) 14(9.9,-7.62) 15(9.9,-6.35) 16(9.9,-5.08) 17(9.9,-3.81) 18(9.9,-2.54) 19(9.9,-1.27) 20(9.9,0)
  silkscreen extent 1.16,-13.1 8.75,2.04, body extent 0,-13.1 9.9,2, height 1.5

## Part data
C1A C1B C1C C2A C2B C2C C3A C3B C3C C4A C4B C4C C5A C5B C5C C6A C6B C6C C7A C7B C7C C8A C8B C8C C9A C9B C9C C10A C10B C10C C11A C11B C11C C12A C12B C12C C13A C13B C13C C14A C14B C14C C15A C15B C15C C16A C16B C16C C17A C17B C17C C18A C18B C18C C19A C19B C19C C20A C20B C20C C21A C21B C21C C22A C22B C22C C23A C23B C23C C24A C24B C24C C25A C25B C25C C26A C26B C26C C27A C27B C27C C28A C28B C28C C29A C29B C29C C30A C30B C30C C31A C31B C31C C32A C32B C32C C33A C33B C33C C34 C35 C36: library part C
D1A D1B D1C D2: "Typical RED, GREEN, YELLOW, AMBER GaAs LED", LatestRevisionDate=17-Jul-2002, LatestRevisionNote="Re-released for DXP Platform.", PackageDescription="SM LED; 2 Flat Leads", PackageReference=3.2X1.6X1.1, PackageVersion=Feb-2002, Published=8-Jun-2000, Publisher="Altium Limited"
P1A P1B P1C: "Header, 15-Pin, Dual row", LatestRevisionDate=17-Jul-2002, LatestRevisionNote="Re-released for DXP Platform.", Publisher="Altium Limited"
R1A R1B R1C R2A R2B R2C R4A R4B R4C R5A R5B R5C R6A R6B R6C R7A R7B R7C R8A R8B R8C R9A R9B R9C R10A R10B R10C R11A R11B R11C R12A R12B R12C R13A R13B R13C R14A R14B R14C R15A R15B R15C R16A R16B R16C R17A R17B R17C R18A R18B R18C R19A R19B R19C R20A R20B R20C R21A R21B R21C R22A R22B R22C R23A R23B R23C R44A R44B R44C R45A R45B R45C R47A R47B R47C R49 R50 R51 R52 R53 R54 R55 R56 R57 R58 R59 R60 R61 R62 R63 R64 R65 R66 R67 R68 R69 R70A R70B R70C: library part R
R47 R48: library part R_0.1W_SMD, "Standard thick film resistor", MaxVoltage=100, MPN=ERJU030R00V, Package=RESC1608X55X30NL15T15, Supplier Part Number 1=667-ERJ-U030R00V, ComponentLink1Description=Datasheet, ComponentLink1URL=https://www.mouser.de/datasheet/2/315/AOA0000C334-1314047.pdf, created=2019-12-08_Thilo_Wendt, HelpURL=https://www.mouser.de/datasheet/2/315/AOA0000C334-1314047.pdf, MF=Panasonic, Parameter1=V, Parameter1Desc="Package Method", Parameter2=F, Parameter2Desc="Tolerance Symbol", Supplier 1=Mouser
X1: "Mating Card Layout for HSEC8-150-01-XX-DV-A-BL", Manufacturer=SAMTEC, created=2018_04_23_AGeiger

## Via types
v1: diameter 0.5, hole 0.3, Top Layer to Bottom Layer, 229 vias
v2: diameter 1, hole 0.45, Top Layer to Bottom Layer, 84 vias

## Nets (pads, with @x,y where several pads share a name; then routed paths per layer and width w, separated by ;. In a path a pad name is that pad's centre, name@x,y a point inside that pad or via, vN(x,y) a via of type N, cw(c..) or ccw(c..) an arc to the next point about the centre after c; other vN are vias at no path point)
3V3_PER: X1.13 X1.14
5V_PER: X1.9 X1.10
+5: C1A.1 C1B.1 C1C.1 C36.1 IC1A.1 IC1B.1 IC1C.1 IC4.4 R49.1 | length 165.3
  Top Layer w0.5: IC1C.1@46.13,57.46 46.13,58.133 46.205,58.208 48.292,58.208 v2(48.5,58) ; v2(83,25.5) 82.792,25.292 82.792,23.205 82.867,23.13 IC1B.1@83.54,23.13 ; v2(83,74.5) 82.792,74.292 82.792,72.205 82.867,72.13 IC1A.1@83.54,72.13
  Top Layer w1.4: C36.1@27.025,88 27.025,90.948 27,90.973 27.027,91 R49.1@31.435,91
  Layer 2 w1.4: IC4.4@27,91 69,91 83,77 v2(83,74.5) 83,65 v2(78.234,60.234) 53.184,60.234 50.95,58 v2(48.5,58) ; v2(81.56,51.992) 81,51.432 81,29 83,27 v2(83,25.5)
  Bottom Layer w1.4: v2(78.234,60.234) 81.56,56.908 v2(81.56,51.992)
+5V_ISOLIERTA: C11A.1 C12A.1 C13A.1 IC1A.20 IC2A.4 IC3A.2 IC3A.4 IC3A.6 IC3A.8 IC3A.45 R1A.1 R2A.2 | length 17
  Top Layer w0.3: IC3A.45@101.975,64.5 103.225,64.5 v2(103.975,63.75) 103.975,62.75 ; IC3A.2@103.975,61.5 103.975,62.75 ; IC3A.4@104.975,61.5 104.975,62.75 ; IC3A.6@105.975,61.5 105.975,62.75 ; IC3A.8@106.975,61.5 106.975,62.5 106.725,62.75 105.975,62.75 ; 103.975,62.75 104.975,62.75 ; 104.975,62.75 105.975,62.75
  Top Layer w0.5: IC1A.20@93.44,72.13 93.881,72.13 93.95,72.199 v2(93.95,74.5)
  Top Layer w1.4: C13A.1@90.5,79.5 90.5,82.418 90.555,82.473 IC2A.4@90.555,82.5
  other v2: 102.025,57 98,68.025 94.91,83.18
+5V_ISOLIERTB: C11B.1 C12B.1 C13B.1 IC1B.20 IC2B.4 IC3B.2 IC3B.4 IC3B.6 IC3B.8 IC3B.45 R1B.1 R2B.2 | length 16.9
  Top Layer w0.3: IC3B.45@101.975,15.5 103.225,15.5 v2(103.975,14.75) 103.975,13.75 ; IC3B.2@103.975,12.5 103.975,13.75 ; IC3B.4@104.975,12.5 104.975,13.75 ; IC3B.6@105.975,12.5 105.975,13.75 ; IC3B.8@106.975,12.5 106.975,13.5 106.725,13.75 105.975,13.75 ; 103.975,13.75 104.975,13.75 ; 104.975,13.75 105.975,13.75
  Top Layer w0.5: IC1B.20@93.44,23.13 93.881,23.13 93.95,23.199 v2(93.95,25.5)
  Top Layer w1.4: C13B.1@90.5,30.5 IC2B.4@90.5,33.418
  other v2: 102.025,8 98,19.025 94.91,34.18
+5V_ISOLIERTC: C11C.1 C12C.1 C13C.1 IC1C.20 IC2C.4 IC3C.2 IC3C.4 IC3C.6 IC3C.8 IC3C.45 R1C.1 R2C.2 | length 16.9
  Top Layer w0.3: IC3C.8@35.5,34.025 36.5,34.025 36.75,34.275 36.75,35.025 ; IC3C.6@35.5,35.025 36.75,35.025 ; IC3C.4@35.5,36.025 36.75,36.025 ; IC3C.2@35.5,37.025 36.75,37.025 ; IC3C.45@38.5,39.025 38.5,37.775 v2(37.75,37.025) 36.75,37.025 ; 36.75,35.025 36.75,36.025 ; 36.75,36.025 36.75,37.025
  Top Layer w0.5: IC1C.20@46.13,47.56 46.13,47.119 46.199,47.05 v2(48.5,47.05)
  Top Layer w1.4: C13C.1@53.5,50.5 IC2C.4@56.418,50.5
  other v2: 31,38.975 42.025,43 57.18,46.09
Collective_FLT: X1.96
CPLD_DigIn_01: X1.83
CPLD_DigIn_02: X1.85
CPLD_DigOut_01: X1.84
CPLD_DigOut_02: X1.86
DCLK_BUS1: IC1A.9 R55.2 | length 81.1
  Top Layer w0.6: R55.2@9.942,67 18,67 24.75,73.75 63.75,73.75 75.58,61.92 IC1A.9@83.35,61.92
DCLK_BUS2: IC1B.9 R61.2 | length 123
  Top Layer w0.6: R61.2@9.917,55 15,55 27.75,67.75 61,67.75 73.25,55.5 73.25,18.75 79.1,12.9 IC1B.9@83.35,12.9
DCLK_BUS3: IC1C.9 R67.2 | length 35.3
  Top Layer w0.6: R67.2@9.917,43 12,43 29.5,60.5 34.75,60.5 35.88,59.37 IC1C.9@35.88,57.75
DIG_IO_01: R50.1 X1.17 | length 26.7
  Top Layer w0.5: X1.17@-12.44,64.791 -3.209,64.791 5,73 5,75.25 6.71,76.96 7.828,76.96 R50.1@7.867,77
DIG_IO_02: R51.1 X1.18 | length 24.5
  Bottom Layer w0.5: X1.18@-12.44,64.791 -3.209,64.791 6.904,74.904 7.772,74.904 v2(7.867,75)
DIG_IO_03: R52.1 X1.21 | length 25.7
  Top Layer w0.5: X1.21@-12.44,63.191 -0.809,63.191 6,70 6,72.25 6.735,72.985 7.878,72.985 R52.1@7.892,73
DIG_IO_04: R53.1 X1.22 | length 23.6
  Bottom Layer w0.5: X1.22@-12.44,63.191 -0.809,63.191 7,71 v2(7.892,71)
DIG_IO_05: R54.1 X1.25 | length 24.6
  Top Layer w0.5: X1.25@-12.44,61.591 1.341,61.591 6,66.25 6,68.25 6.735,68.985 7.878,68.985 R54.1@7.892,69
DIG_IO_06: R55.1 X1.26 | length 22.6
  Bottom Layer w0.5: X1.26@-12.44,61.591 1.341,61.591 6.69,66.94 7.832,66.94 v2(7.892,67)
DIG_IO_07: R56.1 X1.29 | length 23.9
  Top Layer w0.5: X1.29@-12.44,59.991 3.991,59.991 6,62 6,64.5 6.5,65 R56.1@7.892,65
DIG_IO_08: R57.1 X1.30 | length 21.6
  Bottom Layer w0.5: X1.30@-12.44,59.991 3.991,59.991 7,63 v2(7.867,63)
DIG_IO_09: R58.1 X1.33 | length 21.4
  Top Layer w0.5: X1.33@-12.44,58.391 4.641,58.391 6.816,60.566 7.458,60.566 R58.1@7.892,61
DIG_IO_10: R59.1 X1.34 | length 20.6
  Bottom Layer w0.5: X1.34@-12.44,58.391 4.641,58.391 5.25,59 v2(7.867,59)
DIG_IO_11: R60.1 X1.37 | length 20.4
  Top Layer w0.5: X1.37@-12.44,56.791 4.291,56.791 4.5,57 R60.1@7.892,57
DIG_IO_12: R61.1 X1.38 | length 21
  Bottom Layer w0.5: X1.38@-12.44,56.791 4.209,56.791 6,55 v2(7.867,55)
DIG_IO_13: R62.1 X1.41 | length 21.2
  Top Layer w0.5: X1.41@-12.44,55.191 3.309,55.191 5.5,53 R62.1@7.867,53
DIG_IO_14: R63.1 X1.42 | length 22
  Bottom Layer w0.5: X1.42@-12.44,55.191 3.309,55.191 7.404,51.096 7.772,51.096 v2(7.867,51)
DIG_IO_15: R64.1 X1.45 | length 22.2
  Top Layer w0.5: X1.45@-12.44,53.591 0.909,53.591 5.5,49 R64.1@7.867,49
DIG_IO_16: R65.1 X1.46 | length 23
  Bottom Layer w0.5: X1.46@-12.44,53.591 0.909,53.591 7.404,47.096 7.772,47.096 v2(7.867,47)
DIG_IO_17: R66.1 X1.49 | length 23.2
  Top Layer w0.5: X1.49@-12.44,51.991 -1.741,51.991 5.25,45 R66.1@7.867,45
DIG_IO_18: R67.1 X1.50 | length 24
  Bottom Layer w0.5: X1.50@-12.44,51.991 -1.741,51.991 7.175,43.075 7.792,43.075 v2(7.867,43)
DIG_IO_19: R68.1 X1.53 | length 24.2
  Top Layer w0.5: X1.53@-12.44,50.391 -4.641,50.391 4.75,41 R68.1@7.892,41
DIG_IO_20: X1.54
DIG_IO_21: X1.57
DIG_IO_22: X1.58
DIG_IO_23: X1.61
DIG_IO_24: X1.62
DIG_IO_25: X1.65
DIG_IO_26: X1.66
DIG_IO_27: X1.69
DIG_IO_28: X1.70
DIG_IO_29: X1.73
DIG_IO_30: X1.74
DIG_Res_01: X1.79
DIG_Res_02: X1.80
DIG_Res_03: X1.91
DIG_Res_04: X1.92
DIG_Res_05: X1.93
DIG_Res_06: X1.94
DIG_Res_07: X1.95
GND: C1A.2 C1B.2 C1C.2 C3A.2 C3B.2 C3C.2 C6A.2 C6B.2 C6C.2 C34.2 C35.2 C36.2 D2.2 IC1A.2 IC1A.10 IC1B.2 IC1B.10 IC1C.2 IC1C.10 IC2A.1 IC2B.1 IC2C.1 IC4.1 IC4.3 R47.1 R69.1 X1.1 X1.2 X1.3 X1.4 X1.7 X1.8 X1.11 X1.12 X1.15 X1.16 X1.19 X1.20 X1.23 X1.24 X1.27 X1.28 X1.31 X1.32 X1.35 X1.36 X1.39 X1.40 X1.43 X1.44 X1.47 X1.48 X1.51 X1.52 X1.55 X1.56 X1.59 X1.60 X1.63 X1.64 X1.67 X1.68 X1.71 X1.72 X1.75 X1.76 X1.81 X1.82 X1.87 X1.88 X1.97 X1.98 | length 45.8
  Top Layer w0.6: v1(34.5,59.25) 34.6,59.15 34.6,57.76 IC1C.10@34.61,57.75 ; IC1C.2@44.77,57.75 44.78,57.76 44.78,59.53 45.3,60.05 v2(48.5,60.05) ; v2(80.95,25.5) 80.95,22.141 81.301,21.79 IC1B.2@83.35,21.79 ; v2(80.95,74.5) 80.95,71.55 81.68,70.82 83.34,70.82 IC1A.2@83.35,70.81 ; v1(81.85,11.5) 81.95,11.6 IC1B.10@83.34,11.6 ; v1(81.85,60.54) 81.95,60.64 IC1A.10@83.34,60.64
  Top Layer w1.4: C35.2@18.975,86 C34.2@18.975,88 18.975,90.568 19.38,90.973 IC4.1@19.38,91 ; IC4.3@24.46,91 24.479,90.981 24.479,90.271 24.975,89.775 C36.2@24.975,88 ; C3C.2@51.5,58.55 55.988,58.55 IC2C.1@56.473,58.065 ; C3B.2@82.45,28.5 82.45,32.988 IC2B.1@82.935,33.473 ; C3A.2@82.45,77.5 C6A.2@82.45,79.5 82.45,81.988 82.935,82.473 IC2A.1@82.935,82.5
  other v1: -0.25,26.5 -0.25,29 -0.25,30.25 -0.25,33 -0.25,35.75 -0.25,38.5 -0.25,41.25 -0.25,44 -0.25,48.75 -0.25,52.25 -0.273,54.407 -0.25,56 -0.258,57.617 -0.25,59.25 -0.25,60.75 -0.25,62.5 -0.25,66 -0.25,69.75 -10.25,71.25 -3,73.5
  other v2: 30.71,88 31.475,93.75
GND_ISOLIERTA: C2A.1 C4A.2 C5A.1 C7A.1 C8A.2 C9A.1 C11A.2 C12A.2 C13A.2 C14A.2 C15A.1 C16A.2 C17A.1 C18A.2 C19A.1 C20A.2 C21A.1 C22A.2 C23A.1 C24A.2 C25A.1 C26A.2 C27A.1 C28A.2 C29A.1 C30A.2 C31A.1 C32A.2 C33A.1 D1A.2 IC1A.11 IC1A.19 IC2A.3 IC3A.1 IC3A.3 IC3A.5 IC3A.7 IC3A.9 IC3A.12 IC3A.15 IC3A.44 R3A.2 R46A.2 R70A.1 | length 74.7
  Top Layer w0.3: IC1A.11@93.25,60.65 96.4,60.65 v2(96.725,60.975) ; IC3A.44@101.975,65 104.225,65 105.225,64 v2(108,64) 108.975,64 109.225,63.75 ; IC3A.1@103.475,61.5 103.475,60.426 103.651,60.25 104.475,60.25 ; IC3A.3@104.475,61.5 104.475,60.25 ; IC3A.5@105.475,61.5 105.475,60.25 ; IC3A.7@106.475,61.5 106.475,60.25 ; IC3A.12@108.975,61.5 108.975,62.5 108.725,62.75 ; IC3A.15@110.475,64 110.45,63.975 109.45,63.975 109.225,63.75 ; 104.475,60.25 105.475,60.25 ; 105.475,60.25 106.475,60.25 ; 106.475,60.25 107.299,60.25 107.475,60.426 IC3A.9@107.475,61.5 107.475,62.5 107.725,62.75 108.725,62.75 ; 108.725,62.75 109.225,63.25 109.225,63.75
  Top Layer w0.5: IC1A.19@93.44,70.86 95.335,70.86 95.975,71.5 95.975,74.475 v2(96,74.5)
  Top Layer w1: C15A.1@117.95,91 117.963,90.988 117.963,53.012 C14A.2@117.975,53
  Top Layer w1.4: IC2A.3@88.015,82.5 88,82.485 88,81.25 88.45,80.8 C13A.2@88.45,79.5
  other v2: 98.95,53 117.959,54.059 96.725,56.975 112,56.975 114,56.975 99.975,57 103.975,57 110.025,57 99.95,72.5 94.285,79.978 94.975,86.25
GND_ISOLIERTB: C2B.1 C4B.2 C5B.1 C7B.1 C8B.2 C9B.1 C11B.2 C12B.2 C13B.2 C14B.2 C15B.1 C16B.2 C17B.1 C18B.2 C19B.1 C20B.2 C21B.1 C22B.2 C23B.1 C24B.2 C25B.1 C26B.2 C27B.1 C28B.2 C29B.1 C30B.2 C31B.1 C32B.2 C33B.1 D1B.2 IC1B.11 IC1B.19 IC2B.3 IC3B.1 IC3B.3 IC3B.5 IC3B.7 IC3B.9 IC3B.12 IC3B.15 IC3B.44 R3B.2 R46B.2 R70B.1 | length 74.7
  Top Layer w0.3: IC1B.11@93.25,11.63 96.38,11.63 v2(96.725,11.975) ; IC3B.44@101.975,16 104.225,16 105.225,15 v2(108,15) 108.975,15 109.225,14.75 ; IC3B.1@103.475,12.5 103.475,11.426 103.651,11.25 104.475,11.25 ; IC3B.3@104.475,12.5 104.475,11.25 ; IC3B.5@105.475,12.5 105.475,11.25 ; IC3B.7@106.475,12.5 106.475,11.25 ; IC3B.12@108.975,12.5 108.975,13.5 108.725,13.75 ; IC3B.15@110.475,15 110.45,14.975 109.45,14.975 109.225,14.75 ; 104.475,11.25 105.475,11.25 ; 105.475,11.25 106.475,11.25 ; 106.475,11.25 107.299,11.25 107.475,11.426 IC3B.9@107.475,12.5 107.475,13.5 107.725,13.75 108.725,13.75 ; 108.725,13.75 109.225,14.25 109.225,14.75
  Top Layer w0.5: IC1B.19@93.44,21.86 95.335,21.86 95.975,22.5 95.975,25.475 v2(96,25.5)
  Top Layer w1: C15B.1@117.95,42 117.963,41.988 117.963,4.012 C14B.2@117.975,4
  Top Layer w1.4: IC2B.3@88,33.485 88,32.25 88.45,31.8 C13B.2@88.45,30.5
  other v2: 98.95,4 117.959,5.059 96.725,7.975 112,7.975 114,7.975 99.975,8 103.975,8 110.025,8 99.95,23.5 94.285,30.978 94.975,37.25
GND_ISOLIERTC: C2C.1 C4C.2 C5C.1 C7C.1 C8C.2 C9C.1 C11C.2 C12C.2 C13C.2 C14C.2 C15C.1 C16C.2 C17C.1 C18C.2 C19C.1 C20C.2 C21C.1 C22C.2 C23C.1 C24C.2 C25C.1 C26C.2 C27C.1 C28C.2 C29C.1 C30C.2 C31C.1 C32C.2 C33C.1 D1C.2 IC1C.11 IC1C.19 IC2C.3 IC3C.1 IC3C.3 IC3C.5 IC3C.7 IC3C.9 IC3C.12 IC3C.15 IC3C.44 R3C.2 R46C.2 R70C.1 | length 74.8
  Top Layer w0.3: IC1C.11@34.61,47.85 34.61,44.64 v2(34.975,44.275) ; IC3C.12@35.5,32.025 36.5,32.025 36.75,32.275 ; IC3C.7@35.5,34.525 34.25,34.525 ; IC3C.5@35.5,35.525 34.25,35.525 ; IC3C.3@35.5,36.525 34.25,36.525 ; IC3C.1@35.5,37.525 34.426,37.525 34.25,37.349 34.25,36.525 ; IC3C.15@38,30.525 37.975,30.55 37.975,31.55 37.75,31.775 ; IC3C.44@39,39.025 39,36.775 38,35.775 v2(38,33) 38,32.025 37.75,31.775 ; 34.25,34.525 34.25,35.525 ; 34.25,34.525 34.25,33.701 34.426,33.525 IC3C.9@35.5,33.525 36.5,33.525 36.75,33.275 36.75,32.275 ; 34.25,35.525 34.25,36.525 ; 36.75,32.275 37.25,31.775 37.75,31.775
  Top Layer w0.5: IC1C.19@44.86,47.56 44.86,45.665 45.5,45.025 48.475,45.025 v2(48.5,45)
  Top Layer w1: C14C.2@27,23.025 27.012,23.037 64.988,23.037 C15C.1@65,23.05
  Top Layer w1.4: C13C.2@53.5,52.55 54.8,52.55 55.25,53 IC2C.3@56.485,53
  other v2: 28.059,23.041 30.975,27 30.975,29 31,30.975 31,37.025 31,41.025 46.5,41.05 27,42.05 30.975,44.275 60.25,46.025 53.978,46.715
I2C0_SCA: X1.90
I2C0_SCL: X1.89
M\S\S\_BUS1: IC1A.6 R53.2 | length 79.5
  Top Layer w0.6: R53.2@9.942,71 19,71 23.75,75.75 64.75,75.75 74.77,65.73 IC1A.6@83.35,65.73
M\S\S\_BUS2: IC1B.6 R59.2 | length 120.4
  Top Layer w0.6: R59.2@9.917,59 16,59 26.75,69.75 61.75,69.75 76.25,55.25 76.25,20.25 79.79,16.71 IC1B.6@83.35,16.71
M\S\S\_BUS3: IC1C.6 R65.2 | length 40.7
  Top Layer w0.6: R65.2@9.917,47 13,47 29.75,63.75 36.25,63.75 39.69,60.31 IC1C.6@39.69,57.75
MCLK_BUS1: IC1A.3 R50.2 | length 78
  Top Layer w0.6: R50.2@9.917,77 20.5,77 22.25,78.75 66.25,78.75 75.46,69.54 IC1A.3@83.35,69.54
MCLK_BUS2: IC1B.3 R56.2 | length 118.8
  Top Layer w0.6: R56.2@9.942,65 17.5,65 25.25,72.75 63.25,72.75 79.25,56.75 79.25,21.75 80.48,20.52 IC1B.3@83.35,20.52
MCLK_BUS3: IC1C.3 R62.2 | length 44.9
  Top Layer w0.6: R62.2@9.917,53 14.5,53 28.25,66.75 37.75,66.75 43.5,61 IC1C.3@43.5,57.75
MI_BUS1: IC1A.5 R52.2 | length 79
  Top Layer w0.6: R52.2@9.942,73 19.5,73 23.25,76.75 65.25,76.75 75,67 IC1A.5@83.35,67
MI_BUS2: IC1B.5 R58.2 | length 119.8
  Top Layer w0.6: R58.2@9.942,61 16.5,61 26.25,70.75 62.25,70.75 77.25,55.75 77.25,20.75 80.02,17.98 IC1B.5@83.35,17.98
MI_BUS3: IC1C.5 R64.2 | length 42.1
  Top Layer w0.6: R64.2@9.917,49 13.5,49 29.25,64.75 36.75,64.75 40.96,60.54 IC1C.5@40.96,57.75
MO_BUS1: IC1A.4 R51.2 | length 78.5
  Top Layer w0.6: R51.2@9.917,75 20,75 22.75,77.75 65.75,77.75 75.23,68.27 IC1A.4@83.35,68.27
MO_BUS2: IC1B.4 R57.2 | length 119.3
  Top Layer w0.6: R57.2@9.917,63 17,63 25.75,71.75 62.75,71.75 78.25,56.25 78.25,21.25 80.25,19.25 IC1B.4@83.35,19.25
MO_BUS3: IC1C.4 R63.2 | length 43.5
  Top Layer w0.6: R63.2@9.917,51 14,51 28.75,65.75 37.25,65.75 42.23,60.77 IC1C.4@42.23,57.75
NetC2A_2: C2A.2 C5A.2 IC3A.11 | length 6.7
  Top Layer w0.3: C2A.2@107.975,57 107.975,58.75 108.475,59.25 IC3A.11@108.475,61.5
  Top Layer w1: C5A.2@106.025,57 C2A.2@107.975,57
NetC2B_2: C2B.2 C5B.2 IC3B.11 | length 6.7
  Top Layer w0.3: C2B.2@107.975,8 107.975,9.75 108.475,10.25 IC3B.11@108.475,12.5
  Top Layer w1: C5B.2@106.025,8 C2B.2@107.975,8
NetC2C_2: C2C.2 C5C.2 IC3C.11 | length 6.7
  Top Layer w0.3: C2C.2@31,33.025 32.75,33.025 33.25,32.525 IC3C.11@35.5,32.525
  Top Layer w1: C2C.2@31,33.025 C5C.2@31,34.975
NetC4A_1: C4A.1 IC3A.46 | length 8.2
  Top Layer w0.3: C4A.1@96.725,59.025 97.275,59.575 97.55,59.575 97.975,60 97.975,61.5 100.475,64 IC3A.46@101.975,64
NetC4B_1: C4B.1 IC3B.46 | length 8.2
  Top Layer w0.3: C4B.1@96.725,10.025 97.275,10.575 97.55,10.575 97.975,11 97.975,12.5 100.475,15 IC3B.46@101.975,15
NetC4C_1: C4C.1 IC3C.46 | length 8.2
  Top Layer w0.3: C4C.1@33.025,44.275 33.575,43.725 33.575,43.45 34,43.025 35.5,43.025 38,40.525 IC3C.46@38,39.025
NetC7A_2: C7A.2 C9A.2 IC3A.13 IC3A.14 | length 7.1
  Top Layer w0.3: IC3A.14@110.475,63.5 IC3A.13@110.475,63 110.475,60.5 111.95,59.025 C9A.2@112,59.025 C7A.2@114,59.025
NetC7B_2: C7B.2 C9B.2 IC3B.13 IC3B.14 | length 7.1
  Top Layer w0.3: IC3B.14@110.475,14.5 IC3B.13@110.475,14 110.475,11.5 111.95,10.025 C9B.2@112,10.025 C7B.2@114,10.025
NetC7C_2: C7C.2 C9C.2 IC3C.13 IC3C.14 | length 7.1
  Top Layer w0.3: C7C.2@33.025,27 C9C.2@33.025,29 33.025,29.05 34.5,30.525 IC3C.13@37,30.525 IC3C.14@37.5,30.525
NetC8A_1: C8A.1 IC3A.43 | length 6.3
  Top Layer w0.3: C8A.1@96.725,63.025 98.125,63.025 100.6,65.5 IC3A.43@101.975,65.5
NetC8B_1: C8B.1 IC3B.43 | length 6.3
  Top Layer w0.3: C8B.1@96.725,14.025 98.125,14.025 100.6,16.5 IC3B.43@101.975,16.5
NetC8C_1: C8C.1 IC3C.43 | length 6.3
  Top Layer w0.3: C8C.1@37.025,44.275 37.025,42.875 39.5,40.4 IC3C.43@39.5,39.025
NetC10A_1: C10A.1 IC3A.48 | length 3.6
  Top Layer w0.3: C10A.1@101.25,60 101.25,61.725 101.375,61.85 101.375,62.975 101.4,63 IC3A.48@101.975,63
NetC10A_2: C10A.2 IC3A.47 | length 5.2
  Top Layer w0.3: C10A.2@99.2,60 99.225,60.025 99.225,61.75 100.975,63.5 IC3A.47@101.975,63.5
NetC10B_1: C10B.1 IC3B.48 | length 3.6
  Top Layer w0.3: C10B.1@101.25,11 101.25,12.725 101.375,12.85 101.375,13.975 101.4,14 IC3B.48@101.975,14
NetC10B_2: C10B.2 IC3B.47 | length 5.2
  Top Layer w0.3: C10B.2@99.2,11 99.225,11.025 99.225,12.75 100.975,14.5 IC3B.47@101.975,14.5
NetC10C_1: C10C.1 IC3C.48 | length 3.6
  Top Layer w0.3: C10C.1@34,39.75 35.725,39.75 35.85,39.625 36.975,39.625 37,39.6 IC3C.48@37,39.025